# EAGLE board proto (EAGLE 9.3.2), part 1 of 4
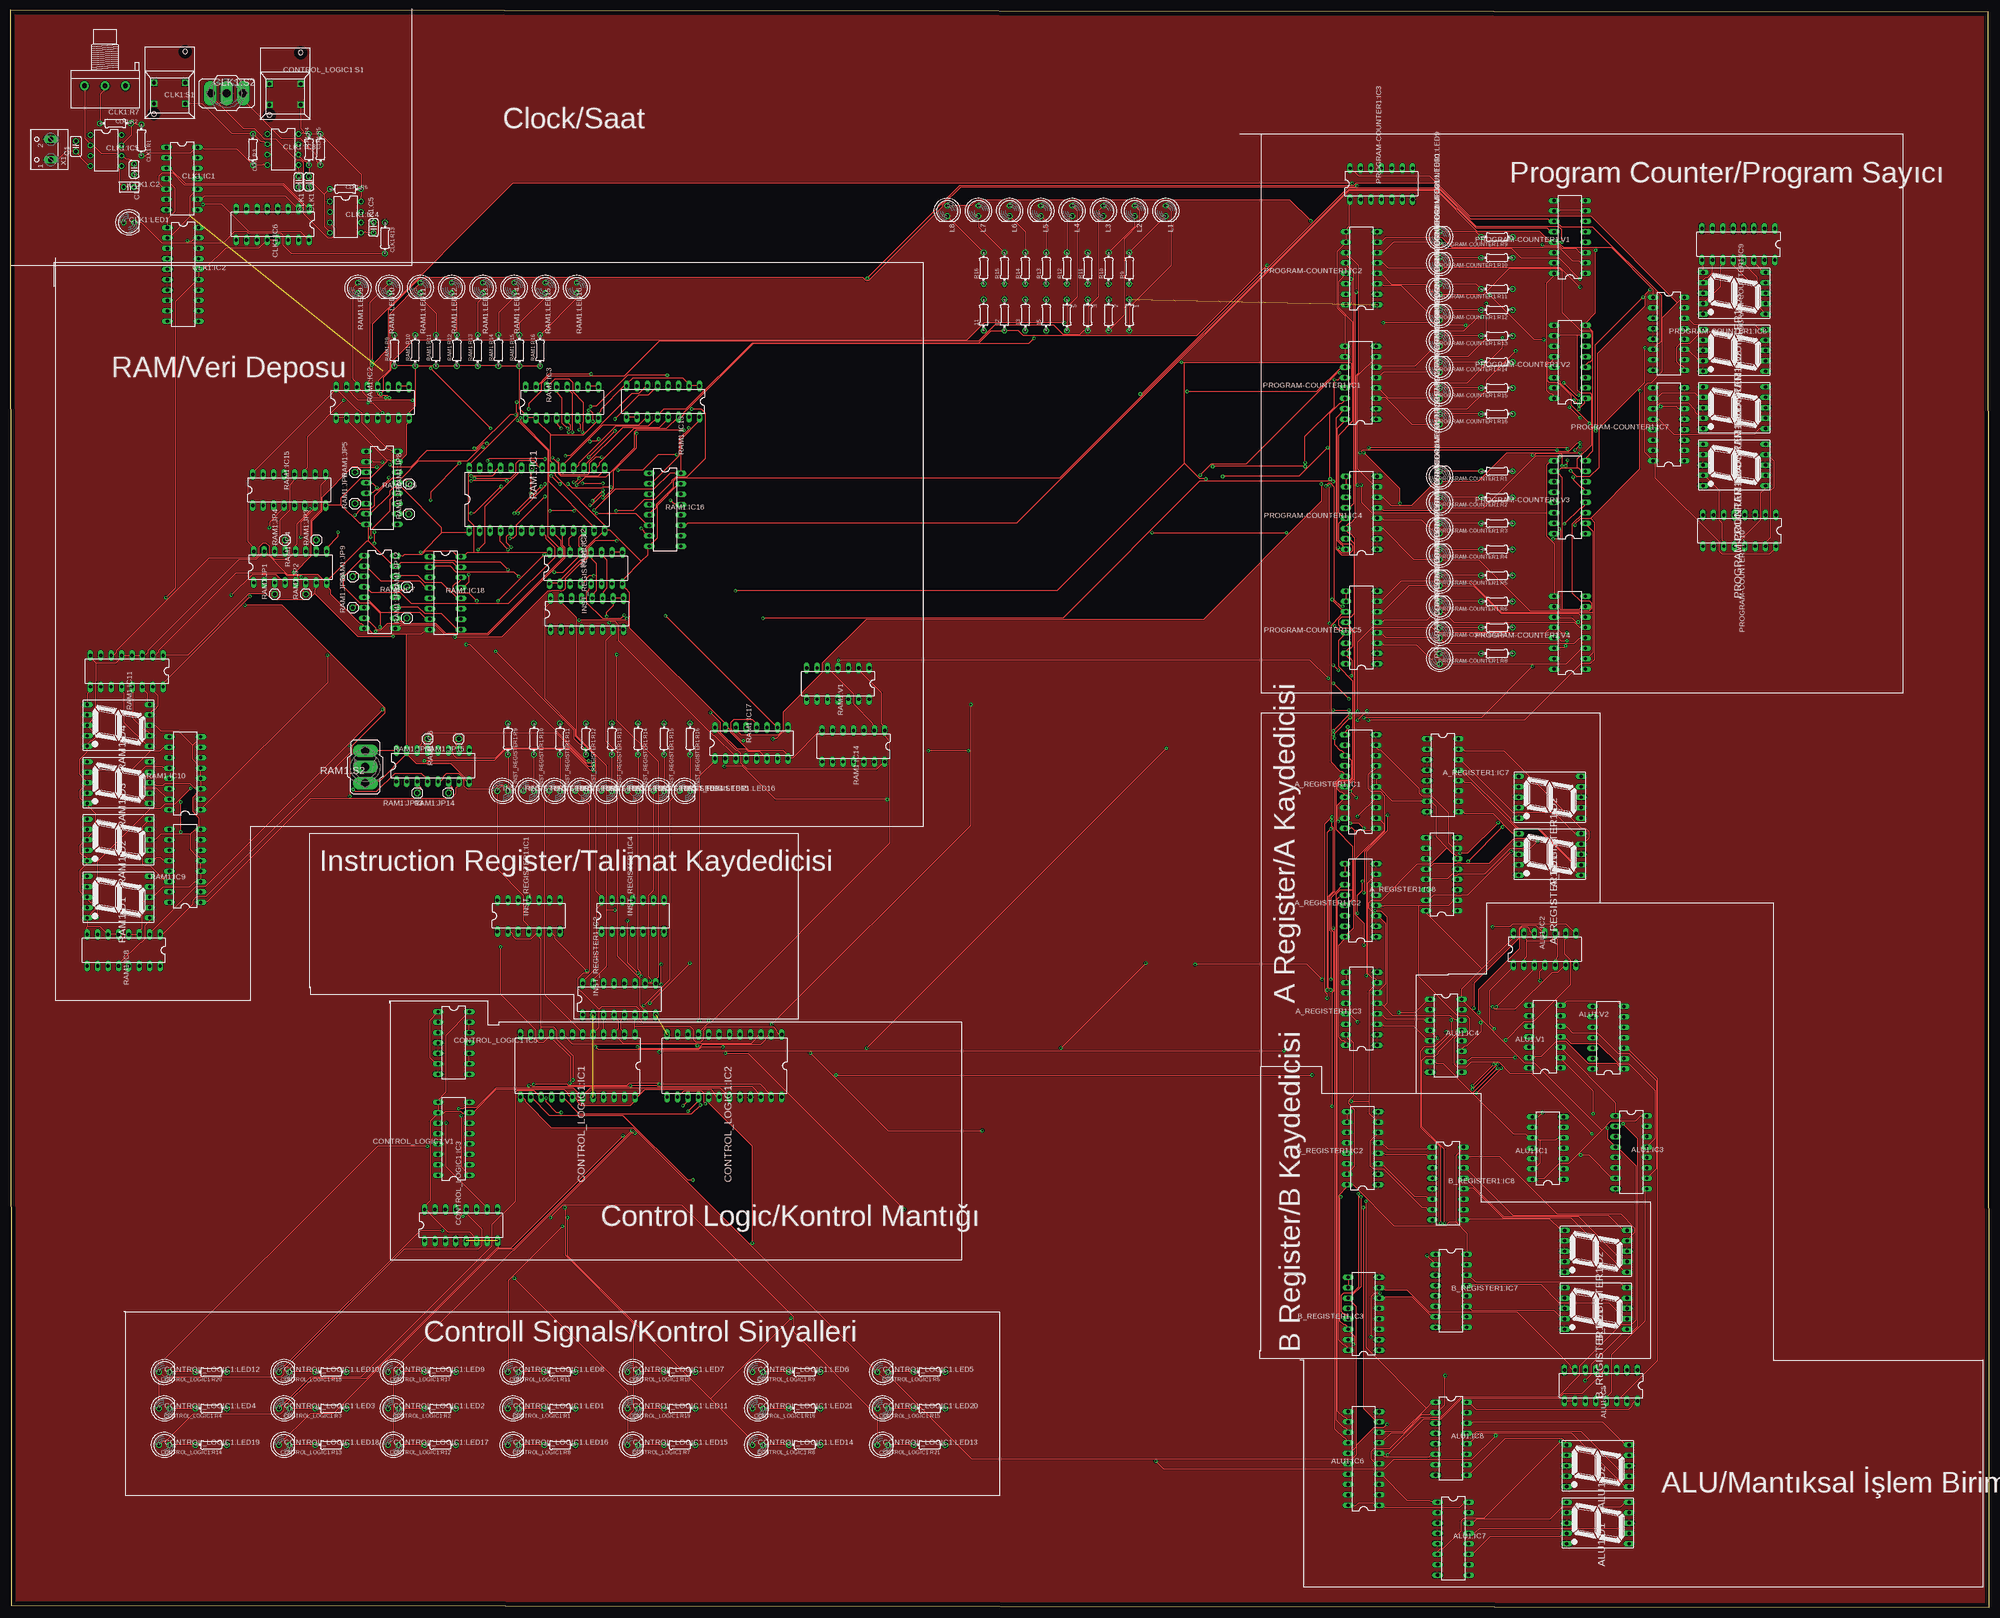
[diagram p0: board, top side]
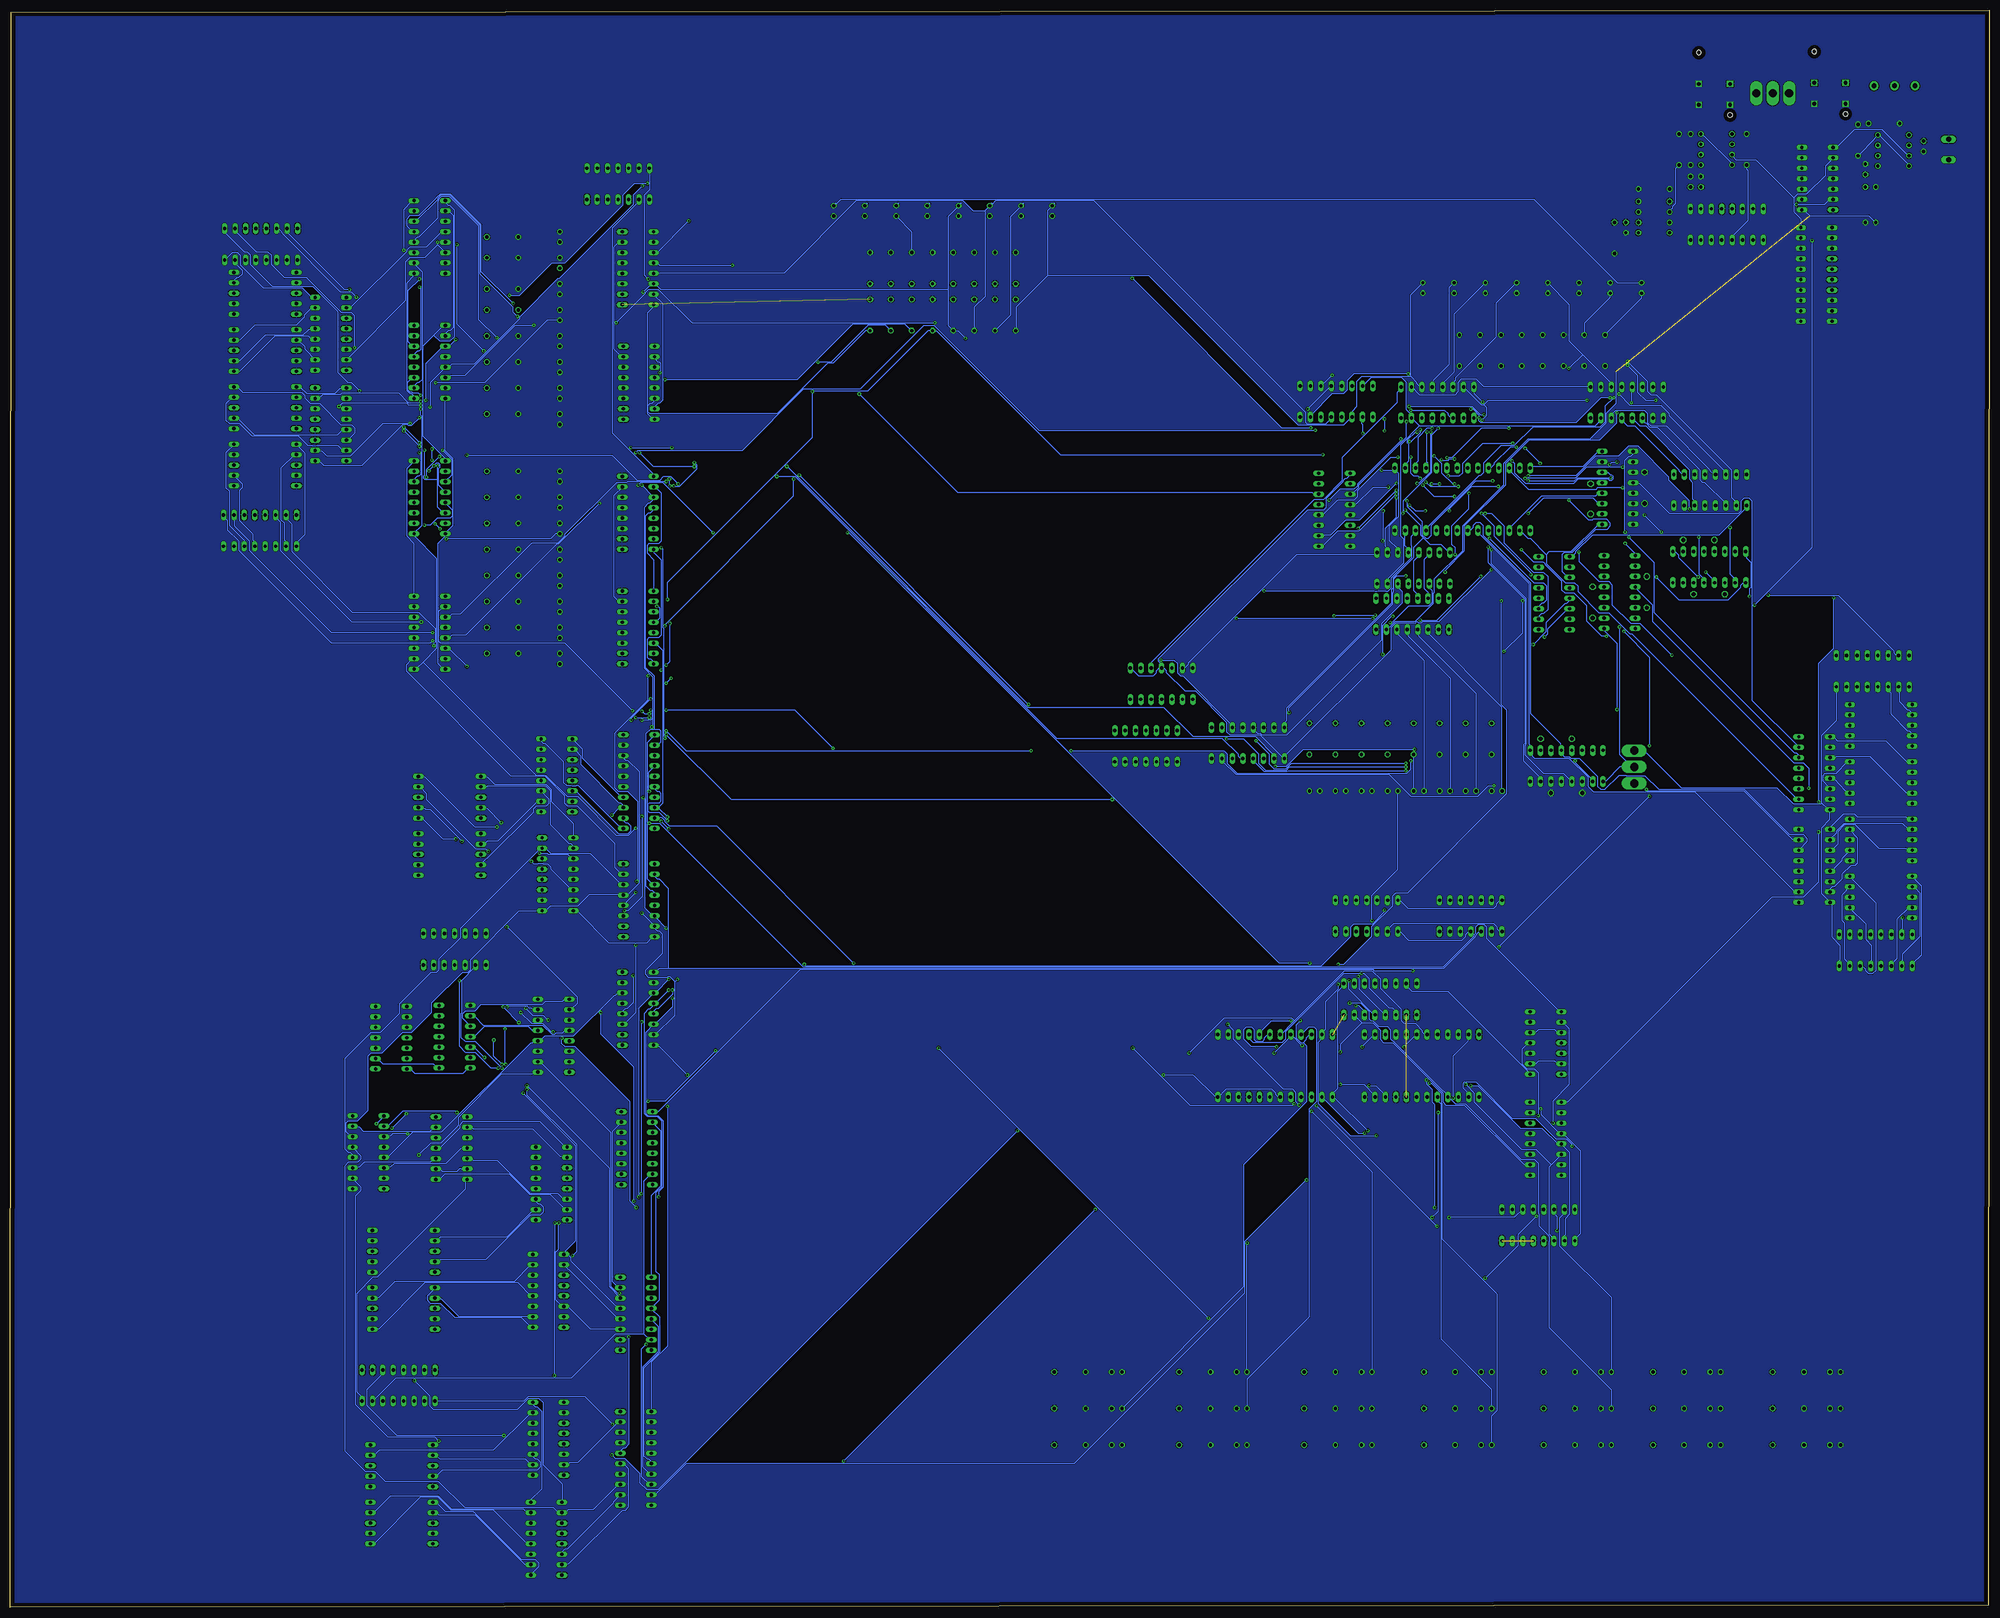
[diagram p1: board, bottom side, seen from below]

Size 482.83 x 389.56 mm. Coordinates in mm from the lower left corner, seen from the top.
Outline: 0.25,0.51 482.83,0 482.58,389.05 0,389.56 0.25,0.51
Copper layers (1*16): Top 0.035mm / dielectric 1.5mm / Bottom 0.035mm
Design rules "default": minimum track width 6mil, minimum drill 0.35mm, track to track 6mil, track to pad 6mil, pad to pad 6mil, via to via 6mil, smd to smd 6mil, copper to edge 40mil, drill to drill 6mil, minimum pad ring 10mil, minimum via ring 8mil, stop-mask expansion 4mil, vias tented up to drill 0mil, thermal gap 10mil
Net classes: 0 default: width 0.254 mm

## Footprints (pad centres in the part's own frame; a part is rotated, then mirrored left to right if it is on the bottom)
0204/7 = drill 0.813 octagon: 1 -3.81,0; 2 3.81,0
7SEG-13 = drill 0.813 long: 1 -5.08,-7.62; 2 -2.54,-7.62; 3 0,-7.62; 4 2.54,-7.62; 5 5.08,-7.62; 6 5.08,7.62; 7 2.54,7.62; 8 0,7.62; 9 -2.54,7.62; 10 -5.08,7.62
DIL20 = drill 0.813 long: 1 -11.43,-3.81; 2 -8.89,-3.81; 3 -6.35,-3.81; 4 -3.81,-3.81; 5 -1.27,-3.81; 6 1.27,-3.81; 7 3.81,-3.81; 8 6.35,-3.81; 9 8.89,-3.81; 10 11.43,-3.81; 11 11.43,3.81; 12 8.89,3.81; 13 6.35,3.81; 14 3.81,3.81; 15 1.27,3.81; 16 -1.27,3.81; 17 -3.81,3.81; 18 -6.35,3.81; 19 -8.89,3.81; 20 -11.43,3.81
DIL16 = drill 0.813 long: 1 -8.89,-3.81; 2 -6.35,-3.81; 3 -3.81,-3.81; 4 -1.27,-3.81; 5 1.27,-3.81; 6 3.81,-3.81; 7 6.35,-3.81; 8 8.89,-3.81; 9 8.89,3.81; 10 6.35,3.81; 11 3.81,3.81; 12 1.27,3.81; 13 -1.27,3.81; 14 -3.81,3.81; 15 -6.35,3.81; 16 -8.89,3.81
DIL14 = drill 0.813 long: 1 -7.62,-3.81; 2 -5.08,-3.81; 3 -2.54,-3.81; 4 0,-3.81; 5 2.54,-3.81; 6 5.08,-3.81; 7 7.62,-3.81; 8 7.62,3.81; 9 5.08,3.81; 10 2.54,3.81; 11 0,3.81; 12 -2.54,3.81; 13 -5.08,3.81; 14 -7.62,3.81
C025-025X050 = drill 0.813 octagon: 1 -1.27,0; 2 1.27,0
C025-024X044 = drill 0.813 octagon: 1 -1.27,0; 2 1.27,0
DIL08 = drill 0.813 pad 1.27: 1 -3.81,-3.81; 2 -1.27,-3.81; 3 1.27,-3.81; 4 3.81,-3.81; 5 3.81,3.81; 6 1.27,3.81; 7 -1.27,3.81; 8 -3.81,3.81
LED5MM = drill 0.813 octagon: A -1.27,0; K 1.27,0
3RP/1610N = drill 1.2 pad 2.184: 1 -5,0; 2 0,0; 3 5,0
5501 = drill 0.9 pad 1.5 square: 1A 0,3.81; 1B 0,-3.81; NC 5.08,-3.81; NO 5.08,3.81 | hole 1.1: -7.62,3.81; 7.62,-3.81
320-916 = drill 2.007 long: 1 0,4.013; 2 0,0; 3 0,-4.013
DIL24 = drill 0.813 long: 1 -13.97,-7.62; 2 -11.43,-7.62; 3 -8.89,-7.62; 4 -6.35,-7.62; 5 -3.81,-7.62; 6 -1.27,-7.62; 7 1.27,-7.62; 8 3.81,-7.62; 9 6.35,-7.62; 10 8.89,-7.62; 11 11.43,-7.62; 12 13.97,-7.62; 13 13.97,7.62; 14 11.43,7.62; 15 8.89,7.62; 16 6.35,7.62; 17 3.81,7.62; 18 1.27,7.62; 19 -1.27,7.62; 20 -3.81,7.62; 21 -6.35,7.62; 22 -8.89,7.62; 23 -11.43,7.62; 24 -13.97,7.62
DIL28-6 = drill 0.813 long: 1 -16.51,-7.62; 2 -13.97,-7.62; 3 -11.43,-7.62; 4 -8.89,-7.62; 5 -6.35,-7.62; 6 -3.81,-7.62; 7 -1.27,-7.62; 8 1.27,-7.62; 9 3.81,-7.62; 10 6.35,-7.62; 11 8.89,-7.62; 12 11.43,-7.62; 13 13.97,-7.62; 14 16.51,-7.62; 15 16.51,7.62; 16 13.97,7.62; 17 11.43,7.62; 18 8.89,7.62; 19 6.35,7.62; 20 3.81,7.62; 21 1.27,7.62; 22 -1.27,7.62; 23 -3.81,7.62; 24 -6.35,7.62; 25 -8.89,7.62; 26 -11.43,7.62; 27 -13.97,7.62; 28 -16.51,7.62
1X01 = drill 1.016 octagon: 1 0,0
W237-102 = drill 1.194 long: 1 -2.5,-1.27; 2 2.5,-1.27

## Placement (x,y rotation side)
1  10k  [0204/7]  273.05,315.21 270 top
2  10k  [0204/7]  267.97,315.21 270 top
3  10k  [0204/7]  262.89,315.21 270 top
5  10k  [0204/7]  257.81,315.21 270 top
11  10k  [0204/7]  237.49,315.21 90 top
12  10k  [0204/7]  242.57,315.21 90 top
13  10k  [0204/7]  247.65,315.21 90 top
15  10k  [0204/7]  252.73,315.21 90 top
A_REGISTER1:D1  [7SEG-13]  375.67,183.64 270 top
A_REGISTER1:D2  [7SEG-13]  375.67,197.61 270 top
A_REGISTER1:IC1  74ACT245N  [DIL20]  329.44,201.42 90 top
A_REGISTER1:IC2  74HC173N  [DIL16]  329.44,172.47 90 top
A_REGISTER1:IC3  74HC173N  [DIL16]  329.69,146.05 90 top
A_REGISTER1:IC7  74LS47N  [DIL16]  349.5,202.95 270 top
A_REGISTER1:IC8  74LS47N  [DIL16]  349.25,178.82 90 top
ALU1:D1  [7SEG-13]  387.35,20.57 270 top
ALU1:D2  [7SEG-13]  387.35,34.54 270 top
ALU1:IC1  74LS86N  [DIL14]  375.16,112.01 90 top
ALU1:IC2  74LS86N  [DIL14]  374.4,160.53 0 top
ALU1:IC3  74AC283N  [DIL16]  395.48,111 270 top
ALU1:IC4  74AC283N  [DIL16]  350.27,139.45 270 top
ALU1:IC5  74HC173N  [DIL16]  388.11,54.1 180 top
ALU1:IC6  74ACT245N  [DIL20]  330.2,36.32 90 top
ALU1:IC7  74LS47N  [DIL16]  352.04,16.76 270 top
ALU1:IC8  74LS47N  [DIL16]  351.54,41.15 270 top
ALU1:V1  744002N  [DIL14]  374.4,139.19 90 top
ALU1:V2  7409N  [DIL14]  389.89,138.94 90 top
B_REGISTER1:D1  [7SEG-13]  386.84,72.9 270 top
B_REGISTER1:D2  [7SEG-13]  386.84,86.87 270 top
B_REGISTER1:IC2  74HC173N  [DIL16]  329.95,112.01 90 top
B_REGISTER1:IC3  74HC173N  [DIL16]  330.2,71.63 90 top
B_REGISTER1:IC7  74LS47N  [DIL16]  351.54,77.22 270 top
B_REGISTER1:IC8  74LS47N  [DIL16]  350.77,103.38 270 top
C1  330uf  [C025-025X050]  16,356.36 90 top
CLK1:C1  1uf  [C025-024X044]  30.23,350.77 270 top
CLK1:C2  0.01uF  [C025-025X050]  28.96,346.46 0 top
CLK1:C3  0.01uF  [C025-024X044]  70.36,347.73 270 top
CLK1:C4  0.1uf  [C025-024X044]  72.9,347.73 270 top
CLK1:C5  0.01uF  [C025-024X044]  88.65,336.55 90 top
CLK1:IC1  74ALS09N  [DIL14]  41.91,348.49 270 top
CLK1:IC2  74AC11004  [DIL20]  42.16,325.12 270 top
CLK1:IC3  LM555N  [DIL08]  66.55,355.6 270 top
CLK1:IC4  LM555N  [DIL08]  81.79,339.09 270 top
CLK1:IC5  LM555N  [DIL08]  23.37,355.35 270 top
CLK1:IC6  74AC11032  [DIL16]  64.01,337.31 180 top
CLK1:LED1  [LED5MM]  28.96,337.82 0 top
CLK1:R1  1k  [0204/7]  32,357.89 270 top
CLK1:R2  1k  [0204/7]  25.65,361.95 0 top
CLK1:R3  1k  [0204/7]  59.18,355.6 270 top
CLK1:R4  1k  [0204/7]  72.9,355.6 90 top
CLK1:R5  1k  [0204/7]  75.69,355.6 90 top
CLK1:R6  1k  [0204/7]  81.79,345.95 0 top
CLK1:R7  [3RP/1610N]  23.11,371.09 180 top
CLK1:R13  220  [0204/7]  91.44,334.01 270 top
CLK1:S1  5501  [5501]  38.86,371.86 270 top
CLK1:S2  [320-916]  52.83,369.32 270 top
CONTROL_LOGIC1:IC1  [DIL24]  138.43,132.08 180 top
CONTROL_LOGIC1:IC2  [DIL24]  174.24,132.08 180 top
CONTROL_LOGIC1:IC3  74AC138N  [DIL16]  109.98,93.22 0 top
CONTROL_LOGIC1:IC5  74AC00N  [DIL14]  108.2,137.67 270 top
CONTROL_LOGIC1:LED1  [LED5MM]  122.68,48.51 0 top
CONTROL_LOGIC1:LED2  [LED5MM]  93.47,48.51 0 top
CONTROL_LOGIC1:LED3  [LED5MM]  66.8,48.51 0 top
CONTROL_LOGIC1:LED4  [LED5MM]  37.59,48.51 0 top
CONTROL_LOGIC1:LED5  [LED5MM]  212.85,57.4 0 top
CONTROL_LOGIC1:LED6  [LED5MM]  182.37,57.4 0 top
CONTROL_LOGIC1:LED7  [LED5MM]  151.89,57.4 0 top
CONTROL_LOGIC1:LED8  [LED5MM]  122.68,57.4 0 top
CONTROL_LOGIC1:LED9  [LED5MM]  93.47,57.4 0 top
CONTROL_LOGIC1:LED10  [LED5MM]  66.8,57.4 0 top
CONTROL_LOGIC1:LED11  [LED5MM]  151.89,48.51 0 top
CONTROL_LOGIC1:LED12  [LED5MM]  37.59,57.4 0 top
CONTROL_LOGIC1:LED13  [LED5MM]  212.85,39.62 0 top
CONTROL_LOGIC1:LED14  [LED5MM]  182.37,39.62 0 top
CONTROL_LOGIC1:LED15  [LED5MM]  151.89,39.62 0 top
CONTROL_LOGIC1:LED16  [LED5MM]  122.68,39.62 0 top
CONTROL_LOGIC1:LED17  [LED5MM]  93.47,39.62 0 top
CONTROL_LOGIC1:LED18  [LED5MM]  66.8,39.62 0 top
CONTROL_LOGIC1:LED19  [LED5MM]  37.59,39.62 0 top
CONTROL_LOGIC1:LED20  [LED5MM]  212.85,48.51 0 top
CONTROL_LOGIC1:LED21  [LED5MM]  182.37,48.51 0 top
CONTROL_LOGIC1:R1  220  [0204/7]  134.11,48.51 180 top
CONTROL_LOGIC1:R2  220  [0204/7]  104.9,48.51 180 top
CONTROL_LOGIC1:R3  220  [0204/7]  78.23,48.51 180 top
CONTROL_LOGIC1:R4  220  [0204/7]  49.02,48.51 180 top
CONTROL_LOGIC1:R5  220  [0204/7]  224.28,57.4 180 top
CONTROL_LOGIC1:R6  220  [0204/7]  193.8,39.62 180 top
CONTROL_LOGIC1:R7  220  [0204/7]  163.32,39.62 180 top
CONTROL_LOGIC1:R8  220  [0204/7]  134.11,39.62 180 top
CONTROL_LOGIC1:R9  220  [0204/7]  193.8,57.4 180 top
CONTROL_LOGIC1:R10  220  [0204/7]  163.32,57.4 180 top
CONTROL_LOGIC1:R11  220  [0204/7]  134.11,57.4 180 top
CONTROL_LOGIC1:R12  220  [0204/7]  104.9,39.62 180 top
CONTROL_LOGIC1:R13  220  [0204/7]  78.23,39.62 180 top
CONTROL_LOGIC1:R14  220  [0204/7]  49.02,39.62 180 top
CONTROL_LOGIC1:R15  220  [0204/7]  224.28,48.51 180 top
CONTROL_LOGIC1:R16  220  [0204/7]  193.8,48.51 180 top
CONTROL_LOGIC1:R17  220  [0204/7]  104.9,57.4 180 top
CONTROL_LOGIC1:R18  220  [0204/7]  78.23,57.4 180 top
CONTROL_LOGIC1:R19  220  [0204/7]  163.32,48.51 180 top
CONTROL_LOGIC1:R20  220  [0204/7]  49.02,57.4 180 top
CONTROL_LOGIC1:R21  220  [0204/7]  224.28,39.62 180 top
CONTROL_LOGIC1:S1  5501  [5501]  67.06,371.6 270 top
CONTROL_LOGIC1:V1  74161N  [DIL16]  108.2,114.3 90 top
INST_REGISTER1:IC1  74ALS09N  [DIL14]  126.49,168.66 0 top
INST_REGISTER1:IC2  74HC173N  [DIL16]  148.59,148.34 0 top
INST_REGISTER1:IC3  74HC173N  [DIL16]  140.72,242.32 0 top
INST_REGISTER1:IC4  74AC04N  [DIL14]  151.89,168.66 0 top
INST_REGISTER1:LED9  [LED5MM]  120.14,199.14 0 top
INST_REGISTER1:LED10  [LED5MM]  126.49,199.14 0 top
INST_REGISTER1:LED11  [LED5MM]  132.84,199.14 0 top
INST_REGISTER1:LED12  [LED5MM]  139.19,199.14 0 top
INST_REGISTER1:LED13  [LED5MM]  145.54,199.14 0 top
INST_REGISTER1:LED14  [LED5MM]  151.89,199.14 0 top
INST_REGISTER1:LED15  [LED5MM]  158.24,199.14 0 top
INST_REGISTER1:LED16  [LED5MM]  164.59,199.14 0 top
INST_REGISTER1:R9  220  [0204/7]  121.41,211.84 270 top
INST_REGISTER1:R10  220  [0204/7]  127.76,211.84 270 top
INST_REGISTER1:R11  220  [0204/7]  134.11,211.84 270 top
INST_REGISTER1:R12  220  [0204/7]  140.46,211.84 270 top
INST_REGISTER1:R13  220  [0204/7]  146.81,211.84 270 top
INST_REGISTER1:R14  220  [0204/7]  153.16,211.84 270 top
INST_REGISTER1:R15  220  [0204/7]  159.51,211.84 270 top
INST_REGISTER1:R16  220  [0204/7]  165.86,211.84 270 top
L1  [LED5MM]  281.94,340.61 270 top
L2  [LED5MM]  274.32,340.61 270 top
L3  [LED5MM]  266.7,340.61 270 top
L4  [LED5MM]  259.08,340.61 270 top
L5  [LED5MM]  251.46,340.61 270 top
L6  [LED5MM]  243.84,340.61 270 top
L7  [LED5MM]  236.22,340.61 270 top
L8  [LED5MM]  228.6,340.61 270 top
PROGRAM-COUNTER1:D1  [7SEG-13]  420.62,292.61 270 top
PROGRAM-COUNTER1:D2  [7SEG-13]  420.62,306.58 270 top
PROGRAM-COUNTER1:D3  [7SEG-13]  420.62,320.55 270 top
PROGRAM-COUNTER1:D4  [7SEG-13]  420.62,278.64 270 top
PROGRAM-COUNTER1:IC1  74HC173N  [DIL16]  329.44,298.7 90 top
PROGRAM-COUNTER1:IC2  74HC173N  [DIL16]  329.69,326.64 90 top
PROGRAM-COUNTER1:IC3  74AC04N  [DIL14]  334.52,347.22 0 top
PROGRAM-COUNTER1:IC4  74HC173N  [DIL16]  329.69,266.95 90 top
PROGRAM-COUNTER1:IC5  74HC173N  [DIL16]  329.69,239.01 90 top
PROGRAM-COUNTER1:IC7  74LS47N  [DIL16]  404.62,288.54 90 top
PROGRAM-COUNTER1:IC8  74LS47N  [DIL16]  404.62,310.64 270 top
PROGRAM-COUNTER1:IC9  74LS47N  [DIL16]  421.64,332.49 180 top
PROGRAM-COUNTER1:IC10  74LS47N  [DIL16]  421.89,262.64 180 top
PROGRAM-COUNTER1:LED1  [LED5MM]  348.74,275.84 90 top
PROGRAM-COUNTER1:LED2  [LED5MM]  348.74,269.49 90 top
PROGRAM-COUNTER1:LED3  [LED5MM]  348.74,263.14 90 top
PROGRAM-COUNTER1:LED4  [LED5MM]  348.74,256.79 90 top
PROGRAM-COUNTER1:LED5  [LED5MM]  348.74,250.44 90 top
PROGRAM-COUNTER1:LED6  [LED5MM]  348.74,244.09 90 top
PROGRAM-COUNTER1:LED7  [LED5MM]  348.74,237.74 90 top
PROGRAM-COUNTER1:LED8  [LED5MM]  348.74,231.39 90 top
PROGRAM-COUNTER1:LED9  [LED5MM]  348.74,334.26 90 top
PROGRAM-COUNTER1:LED10  [LED5MM]  348.74,327.91 90 top
PROGRAM-COUNTER1:LED11  [LED5MM]  348.74,321.56 90 top
PROGRAM-COUNTER1:LED12  [LED5MM]  348.74,315.21 90 top
PROGRAM-COUNTER1:LED13  [LED5MM]  348.74,308.86 90 top
PROGRAM-COUNTER1:LED14  [LED5MM]  348.74,302.51 90 top
PROGRAM-COUNTER1:LED15  [LED5MM]  348.74,296.16 90 top
PROGRAM-COUNTER1:LED16  [LED5MM]  348.74,289.81 90 top
PROGRAM-COUNTER1:R1  220  [0204/7]  362.71,277.11 180 top
PROGRAM-COUNTER1:R2  220  [0204/7]  362.71,270.76 180 top
PROGRAM-COUNTER1:R3  220  [0204/7]  362.71,264.41 180 top
PROGRAM-COUNTER1:R4  220  [0204/7]  362.71,258.06 180 top
PROGRAM-COUNTER1:R5  220  [0204/7]  362.71,251.71 180 top
PROGRAM-COUNTER1:R6  220  [0204/7]  362.71,245.36 180 top
PROGRAM-COUNTER1:R7  220  [0204/7]  362.71,239.01 180 top
PROGRAM-COUNTER1:R8  220  [0204/7]  362.71,232.66 180 top
PROGRAM-COUNTER1:R9  220  [0204/7]  362.71,334.26 180 top
PROGRAM-COUNTER1:R10  220  [0204/7]  362.71,329.18 180 top
PROGRAM-COUNTER1:R11  220  [0204/7]  362.71,321.56 180 top
PROGRAM-COUNTER1:R12  220  [0204/7]  362.71,316.48 180 top
PROGRAM-COUNTER1:R13  220  [0204/7]  362.71,310.13 180 top
PROGRAM-COUNTER1:R14  220  [0204/7]  362.71,303.78 180 top
PROGRAM-COUNTER1:R15  220  [0204/7]  362.71,297.43 180 top
PROGRAM-COUNTER1:R16  220  [0204/7]  362.71,291.08 180 top
PROGRAM-COUNTER1:V1  74161N  [DIL16]  380.49,334.26 90 top
PROGRAM-COUNTER1:V2  74161N  [DIL16]  380.49,303.78 90 top
PROGRAM-COUNTER1:V3  74161N  [DIL16]  380.49,270.76 90 top
PROGRAM-COUNTER1:V4  74161N  [DIL16]  380.49,237.74 90 top
R9  220  [0204/7]  273.05,326.64 90 top
R10  220  [0204/7]  267.97,326.64 90 top
R11  220  [0204/7]  262.89,326.64 90 top
R12  220  [0204/7]  257.81,326.64 90 top
R13  220  [0204/7]  252.73,326.64 90 top
R14  220  [0204/7]  247.65,326.64 90 top
R15  220  [0204/7]  242.57,326.64 90 top
R16  220  [0204/7]  237.49,326.64 90 top
RAM1:D1  [7SEG-13]  26.42,173.23 270 top
RAM1:D2  [7SEG-13]  26.42,187.2 270 top
RAM1:D3  [7SEG-13]  26.42,201.17 270 top
RAM1:D4  [7SEG-13]  26.42,215.14 270 top
RAM1:IC1  CY62256LL-PC  [DIL28-6]  128.52,270.26 0 top
RAM1:IC2  74HC173N  [DIL16]  88.39,293.88 0 top
RAM1:IC3  74HC173N  [DIL16]  134.62,293.88 0 top
RAM1:IC4  74AC157N  [DIL16]  68.33,253.75 0 top
RAM1:IC5  74AC157N  [DIL16]  90.68,273.05 270 top
RAM1:IC6  74AC157N  [DIL16]  103.12,205.23 0 top
RAM1:IC7  74AC157N  [DIL16]  90.17,247.65 270 top
RAM1:IC8  74LS47N  [DIL16]  27.69,160.27 180 top
RAM1:IC9  74LS47N  [DIL16]  42.67,180.85 90 top
RAM1:IC10  74LS47N  [DIL16]  42.67,203.45 90 top
RAM1:IC11  74LS47N  [DIL16]  28.45,228.35 180 top
RAM1:IC12  74HC173N  [DIL16]  140.46,253.49 0 top
RAM1:IC13  74HC173N  [DIL16]  159.26,294.13 180 top
RAM1:IC14  74AC04N  [DIL14]  205.74,210.06 180 top
RAM1:IC15  74AC157N  [DIL16]  68.07,272.54 0 top
RAM1:IC16  74AC157N  [DIL16]  159.77,267.72 270 top
RAM1:IC17  74AC157N  [DIL16]  180.85,210.82 0 top
RAM1:IC18  74AC157N  [DIL16]  106.17,247.4 270 top
RAM1:JP1  [1X01]  64.52,247.14 90 top
RAM1:JP2  [1X01]  72.14,247.14 90 top
RAM1:JP3  [1X01]  74.68,260.35 90 top
RAM1:JP4  [1X01]  67.06,260.35 90 top
RAM1:JP5  [1X01]  84.07,276.86 90 top
RAM1:JP6  [1X01]  84.07,269.24 90 top
RAM1:JP7  [1X01]  97.28,266.7 90 top
RAM1:JP8  [1X01]  97.28,274.07 90 top
RAM1:JP9  [1X01]  83.57,251.46 90 top
RAM1:JP10  [1X01]  83.57,243.84 90 top
RAM1:JP11  [1X01]  96.77,241.3 90 top
RAM1:JP12  [1X01]  96.77,248.92 90 top
RAM1:JP13  [1X01]  99.31,198.63 180 top
RAM1:JP14  [1X01]  106.93,198.63 180 top
RAM1:JP15  [1X01]  109.47,211.84 180 top
RAM1:JP16  [1X01]  101.85,211.84 180 top
RAM1:LED9  [LED5MM]  84.84,321.82 270 top
RAM1:LED10  [LED5MM]  92.46,321.82 270 top
RAM1:LED11  [LED5MM]  100.08,321.82 270 top
RAM1:LED12  [LED5MM]  107.7,321.82 270 top
RAM1:LED13  [LED5MM]  115.32,321.82 270 top
RAM1:LED14  [LED5MM]  122.94,321.82 270 top
RAM1:LED15  [LED5MM]  130.56,321.82 270 top
RAM1:LED16  [LED5MM]  138.18,321.82 270 top
RAM1:R9  220  [0204/7]  93.73,306.58 90 top
RAM1:R10  220  [0204/7]  98.81,306.58 90 top
RAM1:R11  220  [0204/7]  103.89,306.58 90 top
RAM1:R12  220  [0204/7]  108.97,306.58 90 top
RAM1:R13  220  [0204/7]  114.05,306.58 90 top
RAM1:R14  220  [0204/7]  119.13,306.58 90 top
RAM1:R15  220  [0204/7]  124.21,306.58 90 top
RAM1:R16  220  [0204/7]  129.29,306.58 90 top
RAM1:S2  [320-916]  86.61,204.98 180 top
RAM1:V1  7409N  [DIL14]  201.93,225.3 180 top
X1  [W237-102]  8.64,355.6 90 top

## Library data of the parts
1-3 5 11-13 15 CLK1:R1-CLK1:R6 CLK1:R13 CONTROL_LOGIC1:R1-CONTROL_LOGIC1:R21 INST_REGISTER1:R9-INST_REGISTER1:R16 PROGRAM-COUNTER1:R1-PROGRAM-COUNTER1:R16 R9-R16 RAM1:R9-RAM1:R16 = rcl; SPICEPREFIX: R
A_REGISTER1:D1 A_REGISTER1:D2 ALU1:D1 ALU1:D2 B_REGISTER1:D1 B_REGISTER1:D2 PROGRAM-COUNTER1:D1-PROGRAM-COUNTER1:D4 RAM1:D1-RAM1:D4 = special
A_REGISTER1:IC1-A_REGISTER1:IC3 A_REGISTER1:IC7 A_REGISTER1:IC8 ALU1:IC3-ALU1:IC8 B_REGISTER1:IC2 B_REGISTER1:IC3 B_REGISTER1:IC7 B_REGISTER1:IC8 CLK1:IC1 CONTROL_LOGIC1:IC3 CONTROL_LOGIC1:IC5 INST_REGISTER1:IC1-INST_REGISTER1:IC4 PROGRAM-COUNTER1:IC1-PROGRAM-COUNTER1:IC5 PROGRAM-COUNTER1:IC7-PROGRAM-COUNTER1:IC10 RAM1:IC2-RAM1:IC18 = 74xx-eu
ALU1:IC1 ALU1:IC2 = 74xx-us
ALU1:V1 ALU1:V2 CONTROL_LOGIC1:V1 PROGRAM-COUNTER1:V1-PROGRAM-COUNTER1:V4 RAM1:V1 = 74ttl-din
C1 CLK1:C1-CLK1:C5 = rcl; SPICEPREFIX: C
CLK1:IC2 CLK1:IC6 = 74ac-logic
CLK1:IC3-CLK1:IC5 = linear
CLK1:LED1 CONTROL_LOGIC1:LED1-CONTROL_LOGIC1:LED21 INST_REGISTER1:LED9-INST_REGISTER1:LED16 L1-L8 PROGRAM-COUNTER1:LED1-PROGRAM-COUNTER1:LED16 RAM1:LED9-RAM1:LED16 = led
CLK1:R7 = pot
CLK1:S1 CLK1:S2 CONTROL_LOGIC1:S1 RAM1:S2 = switch
CONTROL_LOGIC1:IC1 CONTROL_LOGIC1:IC2 = memory
RAM1:IC1 = memory-sram
RAM1:JP1-RAM1:JP16 = pinhead
X1 = con-wago-500; MPN: 237-102; OC_FARNELL: unknown; OC_NEWARK: 70K9898

## Nets
8B_1: 1.2 A_REGISTER1:IC1.18 A_REGISTER1:IC3.14 ALU1:IC6.18 B_REGISTER1:IC3.14 INST_REGISTER1:IC3.14 L1.A PROGRAM-COUNTER1:IC1.14 PROGRAM-COUNTER1:IC5.14 RAM1:IC1.11 RAM1:IC2.14 RAM1:IC12.14 RAM1:LED9.A
8B_2: 2.2 A_REGISTER1:IC1.17 A_REGISTER1:IC3.13 ALU1:IC6.17 B_REGISTER1:IC3.13 INST_REGISTER1:IC3.13 L2.A PROGRAM-COUNTER1:IC1.13 PROGRAM-COUNTER1:IC5.13 RAM1:IC1.12 RAM1:IC2.13 RAM1:IC12.13 RAM1:LED10.A
8B_3: 3.2 A_REGISTER1:IC1.16 A_REGISTER1:IC3.12 ALU1:IC6.16 B_REGISTER1:IC3.12 INST_REGISTER1:IC3.12 L3.A PROGRAM-COUNTER1:IC1.12 PROGRAM-COUNTER1:IC5.12 RAM1:IC1.13 RAM1:IC2.12 RAM1:IC12.12 RAM1:LED11.A
8B_4: 5.2 A_REGISTER1:IC1.15 A_REGISTER1:IC3.11 ALU1:IC6.15 B_REGISTER1:IC3.11 INST_REGISTER1:IC3.11 L4.A PROGRAM-COUNTER1:IC1.11 PROGRAM-COUNTER1:IC5.11 RAM1:IC1.15 RAM1:IC2.11 RAM1:IC12.11 RAM1:LED12.A
8B_5: 15.1 A_REGISTER1:IC1.14 A_REGISTER1:IC2.14 ALU1:IC6.14 L5.A PROGRAM-COUNTER1:IC2.14 PROGRAM-COUNTER1:IC4.14 RAM1:IC1.16 RAM1:IC3.14 RAM1:IC13.14 RAM1:LED13.A
8B_6: 13.1 A_REGISTER1:IC1.13 A_REGISTER1:IC2.13 ALU1:IC6.13 L6.A PROGRAM-COUNTER1:IC2.13 PROGRAM-COUNTER1:IC4.13 RAM1:IC1.17 RAM1:IC3.13 RAM1:IC13.13 RAM1:LED14.A
8B_7: 12.1 A_REGISTER1:IC1.12 A_REGISTER1:IC2.12 ALU1:IC6.12 L7.A PROGRAM-COUNTER1:IC2.12 PROGRAM-COUNTER1:IC4.12 RAM1:IC1.18 RAM1:IC3.12 RAM1:IC13.12 RAM1:LED15.A
8B_8: 11.1 A_REGISTER1:IC1.11 A_REGISTER1:IC2.11 ALU1:IC6.11 L8.A PROGRAM-COUNTER1:IC2.11 PROGRAM-COUNTER1:IC4.11 RAM1:IC1.19 RAM1:IC3.11 RAM1:IC13.11 RAM1:LED16.A
A_REGISTER1:N$9: A_REGISTER1:D1.7 A_REGISTER1:IC7.13
A_REGISTER1:N$10: A_REGISTER1:D1.6 A_REGISTER1:IC7.12
A_REGISTER1:N$11: A_REGISTER1:D1.4 A_REGISTER1:IC7.11
A_REGISTER1:N$12: A_REGISTER1:D1.2 A_REGISTER1:IC7.10
A_REGISTER1:N$13: A_REGISTER1:D1.1 A_REGISTER1:IC7.9
A_REGISTER1:N$14: A_REGISTER1:D1.9 A_REGISTER1:IC7.15
A_REGISTER1:N$15: A_REGISTER1:D1.10 A_REGISTER1:IC7.14
A_REGISTER1:N$16: A_REGISTER1:D2.7 A_REGISTER1:IC8.13
A_REGISTER1:N$21: A_REGISTER1:D2.6 A_REGISTER1:IC8.12
A_REGISTER1:N$22: A_REGISTER1:D2.4 A_REGISTER1:IC8.11
A_REGISTER1:N$23: A_REGISTER1:D2.2 A_REGISTER1:IC8.10
A_REGISTER1:N$24: A_REGISTER1:D2.1 A_REGISTER1:IC8.9
A_REGISTER1:N$29: A_REGISTER1:D2.9 A_REGISTER1:IC8.15
A_REGISTER1:N$30: A_REGISTER1:D2.10 A_REGISTER1:IC8.14
ALU1:+UB: ALU1:V1.14 ALU1:V2.14
ALU1:-UB: ALU1:V1.7 ALU1:V2.7
ALU1:A_9: ALU1:IC4.4 ALU1:IC6.9 ALU1:IC8.7 ALU1:V1.9
ALU1:A_10: ALU1:IC4.1 ALU1:IC6.8 ALU1:IC8.1 ALU1:V1.10
ALU1:A_11: ALU1:IC4.10 ALU1:IC6.6 ALU1:IC8.6 ALU1:V1.12
ALU1:A_12: ALU1:IC4.13 ALU1:IC6.7 ALU1:IC8.2 ALU1:V1.11
ALU1:A_13: ALU1:IC3.4 ALU1:IC6.5 ALU1:IC7.7 ALU1:V1.2
ALU1:A_14: ALU1:IC3.1 ALU1:IC6.4 ALU1:IC7.1 ALU1:V1.3
ALU1:A_15: ALU1:IC3.13 ALU1:IC6.3 ALU1:IC7.2 ALU1:V1.4
ALU1:A_16: ALU1:IC3.10 ALU1:IC6.2 ALU1:IC7.6 ALU1:V1.5
ALU1:N$1: ALU1:IC2.11 ALU1:IC4.6
ALU1:N$2: ALU1:IC2.8 ALU1:IC4.2
ALU1:N$3: ALU1:IC2.6 ALU1:IC4.15
ALU1:N$4: ALU1:IC2.3 ALU1:IC4.11
ALU1:N$5: ALU1:IC1.11 ALU1:IC3.6
ALU1:N$6: ALU1:IC1.6 ALU1:IC3.15
ALU1:N$7: ALU1:IC1.8 ALU1:IC3.2
ALU1:N$8: ALU1:IC1.3 ALU1:IC3.11
ALU1:N$9: ALU1:IC3.7 ALU1:IC4.9
ALU1:N$10: ALU1:D1.7 ALU1:IC7.13
ALU1:N$11: ALU1:D1.6 ALU1:IC7.12
ALU1:N$12: ALU1:D1.4 ALU1:IC7.11
ALU1:N$13: ALU1:D1.2 ALU1:IC7.10
ALU1:N$14: ALU1:D1.1 ALU1:IC7.9
ALU1:N$15: ALU1:D1.9 ALU1:IC7.15
ALU1:N$16: ALU1:D1.10 ALU1:IC7.14
ALU1:N$17: ALU1:D2.7 ALU1:IC8.13
ALU1:N$18: ALU1:V1.1 ALU1:V2.2
ALU1:N$19: ALU1:V1.13 ALU1:V2.1
ALU1:N$20: ALU1:IC5.14 ALU1:V2.3
ALU1:N$21: ALU1:D2.6 ALU1:IC8.12
ALU1:N$22: ALU1:D2.4 ALU1:IC8.11
ALU1:N$23: ALU1:D2.2 ALU1:IC8.10
ALU1:N$24: ALU1:D2.1 ALU1:IC8.9
ALU1:N$25: ALU1:IC3.9 ALU1:IC5.13
ALU1:N$29: ALU1:D2.9 ALU1:IC8.15
ALU1:N$30: ALU1:D2.10 ALU1:IC8.14
ALUSUB: CONTROL_LOGIC1:IC1.15 CONTROL_LOGIC1:LED3.A
B_REGISTER1:8B_9: B_REGISTER1:IC2.11
B_REGISTER1:8B_10: B_REGISTER1:IC2.12
B_REGISTER1:8B_11: B_REGISTER1:IC2.13
B_REGISTER1:8B_12: B_REGISTER1:IC2.14
B_REGISTER1:N$9: B_REGISTER1:D1.7 B_REGISTER1:IC7.13
B_REGISTER1:N$10: B_REGISTER1:D1.6 B_REGISTER1:IC7.12
B_REGISTER1:N$11: B_REGISTER1:D1.4 B_REGISTER1:IC7.11
B_REGISTER1:N$12: B_REGISTER1:D1.2 B_REGISTER1:IC7.10
B_REGISTER1:N$13: B_REGISTER1:D1.1 B_REGISTER1:IC7.9
B_REGISTER1:N$14: B_REGISTER1:D1.9 B_REGISTER1:IC7.15
B_REGISTER1:N$15: B_REGISTER1:D1.10 B_REGISTER1:IC7.14
B_REGISTER1:N$16: B_REGISTER1:D2.7 B_REGISTER1:IC8.13
B_REGISTER1:N$21: B_REGISTER1:D2.6 B_REGISTER1:IC8.12
B_REGISTER1:N$22: B_REGISTER1:D2.4 B_REGISTER1:IC8.11
B_REGISTER1:N$23: B_REGISTER1:D2.2 B_REGISTER1:IC8.10
B_REGISTER1:N$24: B_REGISTER1:D2.1 B_REGISTER1:IC8.9
B_REGISTER1:N$29: B_REGISTER1:D2.9 B_REGISTER1:IC8.15
B_REGISTER1:N$30: B_REGISTER1:D2.10 B_REGISTER1:IC8.14
B_REGISTER1:VCC: B_REGISTER1:IC2.16 B_REGISTER1:IC3.16 B_REGISTER1:IC7.16 B_REGISTER1:IC8.16
CF: ALU1:IC5.4 CONTROL_LOGIC1:IC1.7 CONTROL_LOGIC1:IC2.7
CLK: A_REGISTER1:IC2.7 A_REGISTER1:IC3.7 ALU1:IC5.7 B_REGISTER1:IC2.7 B_REGISTER1:IC3.7 CLK1:IC1.8 CLK1:LED1.A CONTROL_LOGIC1:V1.2 INST_REGISTER1:IC2.7 INST_REGISTER1:IC3.7 PROGRAM-COUNTER1:IC1.7 PROGRAM-COUNTER1:IC2.7 PROGRAM-COUNTER1:IC4.7 PROGRAM-COUNTER1:IC5.7 PROGRAM-COUNTER1:V1.2 PROGRAM-COUNTER1:V2.2 PROGRAM-COUNTER1:V3.2 PROGRAM-COUNTER1:V4.2
CLK1:ACLK: CLK1:IC1.1 CLK1:IC5.3
CLK1:AMS: CLK1:IC1.5 CLK1:IC4.3
CLK1:MCLK: CLK1:IC1.2 CLK1:IC2.20 CLK1:IC3.3
CLK1:N$1: CLK1:IC4.2 CLK1:R5.1 CLK1:S2.1
CLK1:N$2: CLK1:IC3.2 CLK1:R3.1 CLK1:S1.NO
CLK1:N$3: CLK1:IC4.4 CLK1:R6.1 CLK1:S2.3
CLK1:N$4: CLK1:C3.1 CLK1:IC3.5
CLK1:N$5: CLK1:C5.1 CLK1:IC4.5
CLK1:N$6: CLK1:LED1.K CLK1:R13.2
CLK1:N$7: CLK1:C4.1 CLK1:IC3.6 CLK1:IC3.7 CLK1:R4.1
CLK1:N$8: CLK1:IC1.10 CLK1:IC2.2
CLK1:N$9: CLK1:IC5.7 CLK1:R1.1 CLK1:R2.2
CLK1:N$10: CLK1:C2.1 CLK1:IC5.5
CLK1:N$11: CLK1:R2.1 CLK1:R7.2
CLK1:N$12: CLK1:IC1.6 CLK1:IC6.16
CLK1:N$13: CLK1:IC1.3 CLK1:IC6.1
CLK1:N$14: CLK1:IC1.9 CLK1:IC6.2
CLK1:N$17: CLK1:IC1.4 CLK1:IC2.1
CLK1:NC: CLK1:IC4.7
CLK1:TRIGGER: CLK1:C1.1 CLK1:IC5.2 CLK1:IC5.6 CLK1:R7.3
CLR: A_REGISTER1:IC2.15 A_REGISTER1:IC3.15 ALU1:IC5.15 B_REGISTER1:IC2.15 B_REGISTER1:IC3.15 CONTROL_LOGIC1:IC5.8 INST_REGISTER1:IC2.15 INST_REGISTER1:IC3.15 PROGRAM-COUNTER1:IC1.15 PROGRAM-COUNTER1:IC2.15 PROGRAM-COUNTER1:IC4.15 PROGRAM-COUNTER1:IC5.15
CONTROL_LOGIC1:+UB: CONTROL_LOGIC1:V1.16
CONTROL_LOGIC1:-UB: CONTROL_LOGIC1:V1.8
CONTROL_LOGIC1:N$1: CONTROL_LOGIC1:IC1.19 CONTROL_LOGIC1:IC2.19 CONTROL_LOGIC1:IC3.1 CONTROL_LOGIC1:V1.12
CONTROL_LOGIC1:N$2: CONTROL_LOGIC1:IC1.22 CONTROL_LOGIC1:IC2.22 CONTROL_LOGIC1:IC3.2 CONTROL_LOGIC1:V1.13
CONTROL_LOGIC1:N$3: CONTROL_LOGIC1:IC1.23 CONTROL_LOGIC1:IC2.23 CONTROL_LOGIC1:IC3.3 CONTROL_LOGIC1:V1.14
CONTROL_LOGIC1:N$4: CONTROL_LOGIC1:IC3.10 CONTROL_LOGIC1:IC5.2
CONTROL_LOGIC1:N$5: CONTROL_LOGIC1:IC3.15 CONTROL_LOGIC1:LED9.A
CONTROL_LOGIC1:N$6: CONTROL_LOGIC1:IC3.14 CONTROL_LOGIC1:LED10.A
CONTROL_LOGIC1:N$7: CONTROL_LOGIC1:IC5.3 CONTROL_LOGIC1:IC5.12 CONTROL_LOGIC1:IC5.13
CONTROL_LOGIC1:N$8: CONTROL_LOGIC1:IC5.11 CONTROL_LOGIC1:V1.1
CONTROL_LOGIC1:N$9: CONTROL_LOGIC1:IC3.13 CONTROL_LOGIC1:LED11.A
CONTROL_LOGIC1:N$10: CONTROL_LOGIC1:IC3.12 CONTROL_LOGIC1:LED12.A
CONTROL_LOGIC1:N$11: CONTROL_LOGIC1:IC3.11 CONTROL_LOGIC1:LED13.A
CONTROL_LOGIC1:N$12: CONTROL_LOGIC1:LED6.K CONTROL_LOGIC1:R9.2
CONTROL_LOGIC1:N$13: CONTROL_LOGIC1:LED7.K CONTROL_LOGIC1:R10.2
CONTROL_LOGIC1:N$14: CONTROL_LOGIC1:LED8.K CONTROL_LOGIC1:R11.2
CONTROL_LOGIC1:N$15: CONTROL_LOGIC1:LED17.K CONTROL_LOGIC1:R12.2
CONTROL_LOGIC1:N$16: CONTROL_LOGIC1:LED18.K CONTROL_LOGIC1:R13.2
CONTROL_LOGIC1:N$17: CONTROL_LOGIC1:LED19.K CONTROL_LOGIC1:R14.2
CONTROL_LOGIC1:N$18: CONTROL_LOGIC1:LED20.K CONTROL_LOGIC1:R15.2
CONTROL_LOGIC1:N$19: CONTROL_LOGIC1:LED21.K CONTROL_LOGIC1:R16.2
CONTROL_LOGIC1:N$20: CONTROL_LOGIC1:LED1.K CONTROL_LOGIC1:R1.2
CONTROL_LOGIC1:N$21: CONTROL_LOGIC1:LED2.K CONTROL_LOGIC1:R2.2
CONTROL_LOGIC1:N$22: CONTROL_LOGIC1:LED3.K CONTROL_LOGIC1:R3.2
CONTROL_LOGIC1:N$23: CONTROL_LOGIC1:LED4.K CONTROL_LOGIC1:R4.2
CONTROL_LOGIC1:N$24: CONTROL_LOGIC1:LED5.K CONTROL_LOGIC1:R5.2
CONTROL_LOGIC1:N$25: CONTROL_LOGIC1:LED14.K CONTROL_LOGIC1:R6.2
CONTROL_LOGIC1:N$26: CONTROL_LOGIC1:LED15.K CONTROL_LOGIC1:R7.2
CONTROL_LOGIC1:N$27: CONTROL_LOGIC1:IC2.17 CONTROL_LOGIC1:LED6.A
CONTROL_LOGIC1:N$28: CONTROL_LOGIC1:LED16.K CONTROL_LOGIC1:R8.2
CONTROL_LOGIC1:N$29: CONTROL_LOGIC1:LED9.K CONTROL_LOGIC1:R17.2
CONTROL_LOGIC1:N$30: CONTROL_LOGIC1:LED10.K CONTROL_LOGIC1:R18.2
CONTROL_LOGIC1:N$31: CONTROL_LOGIC1:LED11.K CONTROL_LOGIC1:R19.2
CONTROL_LOGIC1:N$32: CONTROL_LOGIC1:LED12.K CONTROL_LOGIC1:R20.2
CONTROL_LOGIC1:N$33: CONTROL_LOGIC1:LED13.K CONTROL_LOGIC1:R21.2
CONTROL_LOGIC1:NNOW: CONTROL_LOGIC1:IC2.16 CONTROL_LOGIC1:LED7.A
CONTROL_LOGIC1:NNOW2: CONTROL_LOGIC1:IC2.15 CONTROL_LOGIC1:LED8.A
COUNT: CONTROL_LOGIC1:IC2.14 CONTROL_LOGIC1:LED17.A PROGRAM-COUNTER1:V1.7 PROGRAM-COUNTER1:V1.10 PROGRAM-COUNTER1:V2.7 PROGRAM-COUNTER1:V2.10 PROGRAM-COUNTER1:V3.7 PROGRAM-COUNTER1:V3.10 PROGRAM-COUNTER1:V4.7 PROGRAM-COUNTER1:V4.10
GND: 1.1 2.1 3.1 5.1 11.2 12.2 13.2 15.2 A_REGISTER1:D1.3 A_REGISTER1:D1.5 A_REGISTER1:D1.8 A_REGISTER1:D2.3 A_REGISTER1:D2.5 A_REGISTER1:D2.8 A_REGISTER1:IC1.10 A_REGISTER1:IC2.1 A_REGISTER1:IC2.2 A_REGISTER1:IC2.8 A_REGISTER1:IC3.1 A_REGISTER1:IC3.2 A_REGISTER1:IC3.8 A_REGISTER1:IC7.3 A_REGISTER1:IC7.4 A_REGISTER1:IC7.5 A_REGISTER1:IC7.8 A_REGISTER1:IC8.3 A_REGISTER1:IC8.4 A_REGISTER1:IC8.5 A_REGISTER1:IC8.8 ALU1:D1.3 ALU1:D1.5 ALU1:D1.8 ALU1:D2.3 ALU1:D2.5 ALU1:D2.8 ALU1:IC1.7 ALU1:IC2.7 ALU1:IC3.8 ALU1:IC4.8 ALU1:IC5.1 ALU1:IC5.2 ALU1:IC5.8 ALU1:IC6.10 ALU1:IC7.3 ALU1:IC7.4 ALU1:IC7.5 ALU1:IC7.8 ALU1:IC8.3 ALU1:IC8.4 ALU1:IC8.5 ALU1:IC8.8 B_REGISTER1:D1.3 B_REGISTER1:D1.5 B_REGISTER1:D1.8 B_REGISTER1:D2.3 B_REGISTER1:D2.5 B_REGISTER1:D2.8 B_REGISTER1:IC2.1 B_REGISTER1:IC2.2 B_REGISTER1:IC2.8 B_REGISTER1:IC3.1 B_REGISTER1:IC3.2 B_REGISTER1:IC3.8 B_REGISTER1:IC7.3 B_REGISTER1:IC7.4 B_REGISTER1:IC7.5 B_REGISTER1:IC7.8 B_REGISTER1:IC8.3 B_REGISTER1:IC8.4 B_REGISTER1:IC8.5 B_REGISTER1:IC8.8 C1.2 CLK1:C1.2 CLK1:C2.2 CLK1:C3.2 CLK1:C4.2 CLK1:C5.2 CLK1:IC1.7 CLK1:IC2.4 CLK1:IC2.5 CLK1:IC2.6 CLK1:IC2.7 CLK1:IC3.1 CLK1:IC4.1 CLK1:IC4.6 CLK1:IC5.1 CLK1:IC6.4 CLK1:IC6.5 CLK1:R13.1 CLK1:S1.1A CLK1:S1.1B CLK1:S2.2 CONTROL_LOGIC1:IC1.12 CONTROL_LOGIC1:IC1.20 CONTROL_LOGIC1:IC1.21 CONTROL_LOGIC1:IC2.12 CONTROL_LOGIC1:IC2.20 CONTROL_LOGIC1:IC2.21 CONTROL_LOGIC1:IC3.4 CONTROL_LOGIC1:IC3.5 CONTROL_LOGIC1:IC3.8 CONTROL_LOGIC1:IC5.4 CONTROL_LOGIC1:IC5.5 CONTROL_LOGIC1:IC5.7 CONTROL_LOGIC1:R1.1 CONTROL_LOGIC1:R2.1 CONTROL_LOGIC1:R3.1 CONTROL_LOGIC1:R4.1 CONTROL_LOGIC1:R5.1 CONTROL_LOGIC1:R6.1 CONTROL_LOGIC1:R7.1 CONTROL_LOGIC1:R8.1 CONTROL_LOGIC1:R9.1 CONTROL_LOGIC1:R10.1 CONTROL_LOGIC1:R11.1 CONTROL_LOGIC1:R12.1 CONTROL_LOGIC1:R13.1 CONTROL_LOGIC1:R14.1 CONTROL_LOGIC1:R15.1 CONTROL_LOGIC1:R16.1 CONTROL_LOGIC1:R17.1 CONTROL_LOGIC1:R18.1 CONTROL_LOGIC1:R19.1 CONTROL_LOGIC1:R20.1 CONTROL_LOGIC1:R21.1 CONTROL_LOGIC1:S1.1B INST_REGISTER1:IC1.7 INST_REGISTER1:IC2.1 INST_REGISTER1:IC2.2 INST_REGISTER1:IC2.8 INST_REGISTER1:IC3.1 INST_REGISTER1:IC3.2 INST_REGISTER1:IC3.8 INST_REGISTER1:IC4.7 INST_REGISTER1:R9.1 INST_REGISTER1:R10.1 INST_REGISTER1:R11.1 INST_REGISTER1:R12.1 INST_REGISTER1:R13.1 INST_REGISTER1:R14.1 INST_REGISTER1:R15.1 INST_REGISTER1:R16.1 PROGRAM-COUNTER1:D1.3 PROGRAM-COUNTER1:D1.5 PROGRAM-COUNTER1:D1.8 PROGRAM-COUNTER1:D2.3 PROGRAM-COUNTER1:D2.5 PROGRAM-COUNTER1:D2.8 PROGRAM-COUNTER1:D3.3 PROGRAM-COUNTER1:D3.5 PROGRAM-COUNTER1:D3.8 PROGRAM-COUNTER1:D4.3 PROGRAM-COUNTER1:D4.5 PROGRAM-COUNTER1:D4.8 PROGRAM-COUNTER1:IC1.1 PROGRAM-COUNTER1:IC1.2 PROGRAM-COUNTER1:IC1.8 PROGRAM-COUNTER1:IC2.1 PROGRAM-COUNTER1:IC2.2 PROGRAM-COUNTER1:IC2.8 PROGRAM-COUNTER1:IC3.7 PROGRAM-COUNTER1:IC4.1 PROGRAM-COUNTER1:IC4.2 PROGRAM-COUNTER1:IC4.8 PROGRAM-COUNTER1:IC5.1 PROGRAM-COUNTER1:IC5.2 PROGRAM-COUNTER1:IC5.8 PROGRAM-COUNTER1:IC7.3 PROGRAM-COUNTER1:IC7.4 PROGRAM-COUNTER1:IC7.5 PROGRAM-COUNTER1:IC7.8 PROGRAM-COUNTER1:IC8.3 PROGRAM-COUNTER1:IC8.4 PROGRAM-COUNTER1:IC8.5 PROGRAM-COUNTER1:IC8.8 PROGRAM-COUNTER1:IC9.3 PROGRAM-COUNTER1:IC9.4 PROGRAM-COUNTER1:IC9.5 PROGRAM-COUNTER1:IC9.8 PROGRAM-COUNTER1:IC10.3 PROGRAM-COUNTER1:IC10.4 PROGRAM-COUNTER1:IC10.5 PROGRAM-COUNTER1:IC10.8 PROGRAM-COUNTER1:R1.1 PROGRAM-COUNTER1:R2.1 PROGRAM-COUNTER1:R3.1 PROGRAM-COUNTER1:R4.1 PROGRAM-COUNTER1:R5.1 PROGRAM-COUNTER1:R6.1 PROGRAM-COUNTER1:R7.1 PROGRAM-COUNTER1:R8.1 PROGRAM-COUNTER1:R9.1 PROGRAM-COUNTER1:R10.1 PROGRAM-COUNTER1:R11.1 PROGRAM-COUNTER1:R12.1 PROGRAM-COUNTER1:R13.1 PROGRAM-COUNTER1:R14.1 PROGRAM-COUNTER1:R15.1 PROGRAM-COUNTER1:R16.1 R9.1 R10.1 R11.1 R12.1 R13.1 R14.1 R15.1 R16.1 X1.2
HLT: CLK1:IC2.19 CONTROL_LOGIC1:IC1.9 CONTROL_LOGIC1:LED16.A
INST_REGISTER1:8B_9: INST_REGISTER1:IC2.11
INST_REGISTER1:8B_10: INST_REGISTER1:IC2.12
INST_REGISTER1:8B_11: INST_REGISTER1:IC2.13
INST_REGISTER1:8B_12: INST_REGISTER1:IC2.14
INST_REGISTER1:INST_2: INST_REGISTER1:IC3.4 INST_REGISTER1:LED10.A
INST_REGISTER1:N$1: INST_REGISTER1:LED9.K INST_REGISTER1:R9.2
INST_REGISTER1:N$2: INST_REGISTER1:LED10.K INST_REGISTER1:R10.2
INST_REGISTER1:N$3: INST_REGISTER1:LED11.K INST_REGISTER1:R11.2
INST_REGISTER1:N$4: INST_REGISTER1:IC1.1 INST_REGISTER1:IC4.2
INST_REGISTER1:N$5: INST_REGISTER1:LED12.K INST_REGISTER1:R12.2
INST_REGISTER1:N$6: INST_REGISTER1:LED13.K INST_REGISTER1:R13.2
INST_REGISTER1:N$7: INST_REGISTER1:LED14.K INST_REGISTER1:R14.2
INST_REGISTER1:N$8: INST_REGISTER1:LED15.K INST_REGISTER1:R15.2
INST_REGISTER1:N$9: INST_REGISTER1:LED16.K INST_REGISTER1:R16.2
INST_REGISTER1:SLC_REG: INST_REGISTER1:IC1.4 INST_REGISTER1:IC3.3 INST_REGISTER1:IC4.1 INST_REGISTER1:LED9.A
INST_REGISTER1:VCC: INST_REGISTER1:IC1.14 INST_REGISTER1:IC2.16 INST_REGISTER1:IC3.16 INST_REGISTER1:IC4.14
N$1: PROGRAM-COUNTER1:IC7.6 PROGRAM-COUNTER1:V2.11 RAM1:IC15.2
N$2: PROGRAM-COUNTER1:IC7.2 PROGRAM-COUNTER1:V2.12
N$3: PROGRAM-COUNTER1:IC7.1 PROGRAM-COUNTER1:V2.13 RAM1:IC15.11
N$4: PROGRAM-COUNTER1:IC7.7 PROGRAM-COUNTER1:V2.14 RAM1:IC15.14
N$5: PROGRAM-COUNTER1:IC8.6 PROGRAM-COUNTER1:V1.11 RAM1:IC16.2
N$6: PROGRAM-COUNTER1:IC8.2 PROGRAM-COUNTER1:V1.12 RAM1:IC16.5
N$7: PROGRAM-COUNTER1:IC8.1 PROGRAM-COUNTER1:V1.13 RAM1:IC16.11
N$8: PROGRAM-COUNTER1:IC8.7 PROGRAM-COUNTER1:V1.14 RAM1:IC16.14
N$9: PROGRAM-COUNTER1:IC9.6 PROGRAM-COUNTER1:V3.11 RAM1:IC17.2
N$10: PROGRAM-COUNTER1:IC9.2 PROGRAM-COUNTER1:V3.12 RAM1:IC17.5
N$11: PROGRAM-COUNTER1:IC9.1 PROGRAM-COUNTER1:V3.13 RAM1:IC17.11
N$12: PROGRAM-COUNTER1:IC9.7 PROGRAM-COUNTER1:V3.14 RAM1:IC17.14
N$13: PROGRAM-COUNTER1:IC10.6 PROGRAM-COUNTER1:V4.11 RAM1:IC18.2
N$14: PROGRAM-COUNTER1:IC10.2 PROGRAM-COUNTER1:V4.12 RAM1:IC18.5
N$15: PROGRAM-COUNTER1:IC10.1 PROGRAM-COUNTER1:V4.13 RAM1:IC18.11
N$16: PROGRAM-COUNTER1:IC10.7 PROGRAM-COUNTER1:V4.14 RAM1:IC18.14
N$17: A_REGISTER1:IC1.2 A_REGISTER1:IC3.3 A_REGISTER1:IC7.6 ALU1:IC4.5
N$18: A_REGISTER1:IC1.3 A_REGISTER1:IC3.4 A_REGISTER1:IC7.2 ALU1:IC4.3
N$19: A_REGISTER1:IC1.4 A_REGISTER1:IC3.5 A_REGISTER1:IC7.1 ALU1:IC4.14
N$20: A_REGISTER1:IC1.5 A_REGISTER1:IC1.6 A_REGISTER1:IC2.3 A_REGISTER1:IC3.6 A_REGISTER1:IC7.7 A_REGISTER1:IC8.6 ALU1:IC3.5 ALU1:IC4.12
N$21: A_REGISTER1:IC1.7 A_REGISTER1:IC2.4 A_REGISTER1:IC8.2 ALU1:IC3.3
N$22: A_REGISTER1:IC1.8 A_REGISTER1:IC2.5 A_REGISTER1:IC8.1 ALU1:IC3.14
N$23: A_REGISTER1:IC1.9 A_REGISTER1:IC2.6 A_REGISTER1:IC8.7 ALU1:IC3.12
N$24: ALU1:IC2.12 B_REGISTER1:IC3.3 B_REGISTER1:IC7.6
N$25: ALU1:IC2.9 B_REGISTER1:IC3.4 B_REGISTER1:IC7.2
N$26: ALU1:IC2.4 B_REGISTER1:IC3.5 B_REGISTER1:IC7.1
N$27: ALU1:IC2.1 B_REGISTER1:IC3.6 B_REGISTER1:IC7.7
N$28: ALU1:IC1.12 B_REGISTER1:IC2.3 B_REGISTER1:IC8.6
N$29: ALU1:IC1.9 B_REGISTER1:IC2.4 B_REGISTER1:IC8.2
N$30: ALU1:IC1.4 B_REGISTER1:IC2.5 B_REGISTER1:IC8.1
N$31: ALU1:IC1.1 B_REGISTER1:IC2.6 B_REGISTER1:IC8.7
N$32: CONTROL_LOGIC1:IC1.6 CONTROL_LOGIC1:IC2.6 INST_REGISTER1:IC3.5 INST_REGISTER1:LED11.A
N$33: CONTROL_LOGIC1:IC1.5 CONTROL_LOGIC1:IC2.5 INST_REGISTER1:IC3.6 INST_REGISTER1:LED12.A
N$34: CONTROL_LOGIC1:IC1.4 CONTROL_LOGIC1:IC2.4 INST_REGISTER1:IC2.3 INST_REGISTER1:LED13.A
N$35: CONTROL_LOGIC1:IC1.3 CONTROL_LOGIC1:IC2.3 INST_REGISTER1:IC2.4 INST_REGISTER1:LED14.A
N$36: CONTROL_LOGIC1:IC1.2 CONTROL_LOGIC1:IC2.2 INST_REGISTER1:IC2.5 INST_REGISTER1:LED15.A
N$37: CONTROL_LOGIC1:IC1.1 CONTROL_LOGIC1:IC2.1 INST_REGISTER1:IC2.6 INST_REGISTER1:LED16.A
N$38: L1.K R9.2
N$39: L2.K R10.2
N$40: L3.K R11.2
N$41: L4.K R12.2
N$42: L5.K R13.2
N$43: L6.K R14.2
N$44: L7.K R15.2
N$45: L8.K R16.2
PC_LE: CONTROL_LOGIC1:IC1.16 CONTROL_LOGIC1:LED2.A PROGRAM-COUNTER1:V1.9 PROGRAM-COUNTER1:V2.9 PROGRAM-COUNTER1:V3.9 PROGRAM-COUNTER1:V4.9
PC_LRS: CONTROL_LOGIC1:IC1.17 CONTROL_LOGIC1:LED1.A PROGRAM-COUNTER1:IC1.9 PROGRAM-COUNTER1:IC1.10 PROGRAM-COUNTER1:IC2.9 PROGRAM-COUNTER1:IC2.10 PROGRAM-COUNTER1:IC3.1
PROGRAM-COUNTER1:+UB: PROGRAM-COUNTER1:V1.16 PROGRAM-COUNTER1:V2.16 PROGRAM-COUNTER1:V3.16 PROGRAM-COUNTER1:V4.16
PROGRAM-COUNTER1:-UB: PROGRAM-COUNTER1:V1.8 PROGRAM-COUNTER1:V2.8 PROGRAM-COUNTER1:V3.8 PROGRAM-COUNTER1:V4.8
PROGRAM-COUNTER1:N$1: PROGRAM-COUNTER1:IC1.6 PROGRAM-COUNTER1:LED13.A PROGRAM-COUNTER1:V1.6
PROGRAM-COUNTER1:N$2: PROGRAM-COUNTER1:IC2.6 PROGRAM-COUNTER1:LED9.A PROGRAM-COUNTER1:V2.6
PROGRAM-COUNTER1:N$3: PROGRAM-COUNTER1:IC2.5 PROGRAM-COUNTER1:LED10.A PROGRAM-COUNTER1:V2.5
PROGRAM-COUNTER1:N$4: PROGRAM-COUNTER1:IC2.4 PROGRAM-COUNTER1:LED11.A PROGRAM-COUNTER1:V2.4
PROGRAM-COUNTER1:N$5: PROGRAM-COUNTER1:IC2.3 PROGRAM-COUNTER1:LED12.A PROGRAM-COUNTER1:V2.3
PROGRAM-COUNTER1:N$6: PROGRAM-COUNTER1:IC1.5 PROGRAM-COUNTER1:LED14.A PROGRAM-COUNTER1:V1.5
PROGRAM-COUNTER1:N$7: PROGRAM-COUNTER1:IC1.4 PROGRAM-COUNTER1:LED15.A PROGRAM-COUNTER1:V1.4
PROGRAM-COUNTER1:N$8: PROGRAM-COUNTER1:IC1.3 PROGRAM-COUNTER1:LED16.A PROGRAM-COUNTER1:V1.3
PROGRAM-COUNTER1:N$9: PROGRAM-COUNTER1:D1.7 PROGRAM-COUNTER1:IC7.13
PROGRAM-COUNTER1:N$10: PROGRAM-COUNTER1:D1.6 PROGRAM-COUNTER1:IC7.12
PROGRAM-COUNTER1:N$11: PROGRAM-COUNTER1:D1.4 PROGRAM-COUNTER1:IC7.11
PROGRAM-COUNTER1:N$12: PROGRAM-COUNTER1:D1.2 PROGRAM-COUNTER1:IC7.10
PROGRAM-COUNTER1:N$13: PROGRAM-COUNTER1:D1.1 PROGRAM-COUNTER1:IC7.9
PROGRAM-COUNTER1:N$14: PROGRAM-COUNTER1:D1.9 PROGRAM-COUNTER1:IC7.15
PROGRAM-COUNTER1:N$15: PROGRAM-COUNTER1:D1.10 PROGRAM-COUNTER1:IC7.14
PROGRAM-COUNTER1:N$16: PROGRAM-COUNTER1:D2.7 PROGRAM-COUNTER1:IC8.13
PROGRAM-COUNTER1:N$17: PROGRAM-COUNTER1:IC4.6 PROGRAM-COUNTER1:LED1.A PROGRAM-COUNTER1:V3.6
PROGRAM-COUNTER1:N$18: PROGRAM-COUNTER1:IC4.5 PROGRAM-COUNTER1:LED2.A PROGRAM-COUNTER1:V3.5
PROGRAM-COUNTER1:N$19: PROGRAM-COUNTER1:IC4.4 PROGRAM-COUNTER1:LED3.A PROGRAM-COUNTER1:V3.4
PROGRAM-COUNTER1:N$20: PROGRAM-COUNTER1:IC4.3 PROGRAM-COUNTER1:LED4.A PROGRAM-COUNTER1:V3.3
PROGRAM-COUNTER1:N$21: PROGRAM-COUNTER1:D2.6 PROGRAM-COUNTER1:IC8.12
PROGRAM-COUNTER1:N$22: PROGRAM-COUNTER1:D2.4 PROGRAM-COUNTER1:IC8.11
PROGRAM-COUNTER1:N$23: PROGRAM-COUNTER1:D2.2 PROGRAM-COUNTER1:IC8.10
PROGRAM-COUNTER1:N$24: PROGRAM-COUNTER1:D2.1 PROGRAM-COUNTER1:IC8.9
PROGRAM-COUNTER1:N$25: PROGRAM-COUNTER1:IC5.6 PROGRAM-COUNTER1:LED5.A PROGRAM-COUNTER1:V4.6
PROGRAM-COUNTER1:N$26: PROGRAM-COUNTER1:IC5.5 PROGRAM-COUNTER1:LED6.A PROGRAM-COUNTER1:V4.5
PROGRAM-COUNTER1:N$27: PROGRAM-COUNTER1:IC5.4 PROGRAM-COUNTER1:LED7.A PROGRAM-COUNTER1:V4.4
PROGRAM-COUNTER1:N$28: PROGRAM-COUNTER1:IC5.3 PROGRAM-COUNTER1:LED8.A PROGRAM-COUNTER1:V4.3
PROGRAM-COUNTER1:N$29: PROGRAM-COUNTER1:D2.9 PROGRAM-COUNTER1:IC8.15
PROGRAM-COUNTER1:N$30: PROGRAM-COUNTER1:D2.10 PROGRAM-COUNTER1:IC8.14
PROGRAM-COUNTER1:N$31: PROGRAM-COUNTER1:D3.7 PROGRAM-COUNTER1:IC9.13
PROGRAM-COUNTER1:N$32: PROGRAM-COUNTER1:D3.6 PROGRAM-COUNTER1:IC9.12
PROGRAM-COUNTER1:N$33: PROGRAM-COUNTER1:D3.4 PROGRAM-COUNTER1:IC9.11
PROGRAM-COUNTER1:N$34: PROGRAM-COUNTER1:D3.2 PROGRAM-COUNTER1:IC9.10
PROGRAM-COUNTER1:N$35: PROGRAM-COUNTER1:D3.1 PROGRAM-COUNTER1:IC9.9
PROGRAM-COUNTER1:N$36: PROGRAM-COUNTER1:D3.9 PROGRAM-COUNTER1:IC9.15
PROGRAM-COUNTER1:N$37: PROGRAM-COUNTER1:D3.10 PROGRAM-COUNTER1:IC9.14
PROGRAM-COUNTER1:N$38: PROGRAM-COUNTER1:D4.7 PROGRAM-COUNTER1:IC10.13
PROGRAM-COUNTER1:N$39: PROGRAM-COUNTER1:D4.6 PROGRAM-COUNTER1:IC10.12
PROGRAM-COUNTER1:N$40: PROGRAM-COUNTER1:D4.4 PROGRAM-COUNTER1:IC10.11
PROGRAM-COUNTER1:N$41: PROGRAM-COUNTER1:D4.2 PROGRAM-COUNTER1:IC10.10
PROGRAM-COUNTER1:N$42: PROGRAM-COUNTER1:D4.1 PROGRAM-COUNTER1:IC10.9
PROGRAM-COUNTER1:N$43: PROGRAM-COUNTER1:D4.9 PROGRAM-COUNTER1:IC10.15
PROGRAM-COUNTER1:N$44: PROGRAM-COUNTER1:D4.10 PROGRAM-COUNTER1:IC10.14
PROGRAM-COUNTER1:N$45: PROGRAM-COUNTER1:LED9.K PROGRAM-COUNTER1:R9.2
PROGRAM-COUNTER1:N$46: PROGRAM-COUNTER1:LED10.K PROGRAM-COUNTER1:R10.2
PROGRAM-COUNTER1:N$47: PROGRAM-COUNTER1:LED11.K PROGRAM-COUNTER1:R11.2
PROGRAM-COUNTER1:N$48: PROGRAM-COUNTER1:LED12.K PROGRAM-COUNTER1:R12.2
PROGRAM-COUNTER1:N$49: PROGRAM-COUNTER1:LED13.K PROGRAM-COUNTER1:R13.2
PROGRAM-COUNTER1:N$50: PROGRAM-COUNTER1:LED14.K PROGRAM-COUNTER1:R14.2
PROGRAM-COUNTER1:N$51: PROGRAM-COUNTER1:LED15.K PROGRAM-COUNTER1:R15.2
PROGRAM-COUNTER1:N$52: PROGRAM-COUNTER1:LED16.K PROGRAM-COUNTER1:R16.2
PROGRAM-COUNTER1:N$53: PROGRAM-COUNTER1:LED1.K PROGRAM-COUNTER1:R1.2
PROGRAM-COUNTER1:N$54: PROGRAM-COUNTER1:LED2.K PROGRAM-COUNTER1:R2.2
PROGRAM-COUNTER1:N$55: PROGRAM-COUNTER1:LED3.K PROGRAM-COUNTER1:R3.2
PROGRAM-COUNTER1:N$56: PROGRAM-COUNTER1:LED4.K PROGRAM-COUNTER1:R4.2
PROGRAM-COUNTER1:N$57: PROGRAM-COUNTER1:LED5.K PROGRAM-COUNTER1:R5.2
PROGRAM-COUNTER1:N$58: PROGRAM-COUNTER1:LED6.K PROGRAM-COUNTER1:R6.2
PROGRAM-COUNTER1:N$59: PROGRAM-COUNTER1:LED7.K PROGRAM-COUNTER1:R7.2
PROGRAM-COUNTER1:N$60: PROGRAM-COUNTER1:LED8.K PROGRAM-COUNTER1:R8.2
PROGRAM-COUNTER1:VCC: PROGRAM-COUNTER1:IC1.16 PROGRAM-COUNTER1:IC2.16 PROGRAM-COUNTER1:IC3.14 PROGRAM-COUNTER1:IC4.16 PROGRAM-COUNTER1:IC5.16 PROGRAM-COUNTER1:IC7.16 PROGRAM-COUNTER1:IC8.16 PROGRAM-COUNTER1:IC9.16 PROGRAM-COUNTER1:IC10.16
PROGRAM-COUNTER1:|LRS: PROGRAM-COUNTER1:IC3.2 PROGRAM-COUNTER1:IC4.9 PROGRAM-COUNTER1:IC4.10 PROGRAM-COUNTER1:IC5.9 PROGRAM-COUNTER1:IC5.10
RAM1:16B_15: RAM1:IC15.5
RAM1:+UB: RAM1:V1.14
RAM1:-UB: RAM1:V1.7
RAM1:A/M: RAM1:IC4.1 RAM1:IC5.1 RAM1:IC6.1 RAM1:IC7.1 RAM1:S2.2
RAM1:CLK: RAM1:IC2.7 RAM1:IC3.7 RAM1:IC12.7 RAM1:IC13.7
RAM1:CLR: RAM1:IC2.15 RAM1:IC3.15 RAM1:IC12.15 RAM1:IC13.15
RAM1:GND: RAM1:D1.3 RAM1:D1.5 RAM1:D1.8 RAM1:D2.3 RAM1:D2.5 RAM1:D2.8 RAM1:D3.3 RAM1:D3.5 RAM1:D3.8 RAM1:D4.3 RAM1:D4.5 RAM1:D4.8 RAM1:IC1.14 RAM1:IC1.20 RAM1:IC2.1 RAM1:IC2.2 RAM1:IC2.8 RAM1:IC3.1 RAM1:IC3.2 RAM1:IC3.8 RAM1:IC4.8 RAM1:IC4.15 RAM1:IC5.8 RAM1:IC5.15 RAM1:IC6.8 RAM1:IC6.15 RAM1:IC7.8 RAM1:IC7.15 RAM1:IC8.3 RAM1:IC8.4 RAM1:IC8.5 RAM1:IC8.6 RAM1:IC8.8 RAM1:IC9.3 RAM1:IC9.4 RAM1:IC9.5 RAM1:IC9.8 RAM1:IC10.3 RAM1:IC10.4 RAM1:IC10.5 RAM1:IC10.8 RAM1:IC11.3 RAM1:IC11.4 RAM1:IC11.5 RAM1:IC11.8 RAM1:IC12.1 RAM1:IC12.2 RAM1:IC12.8 RAM1:IC13.1 RAM1:IC13.2 RAM1:IC13.8 RAM1:IC14.7 RAM1:IC15.8 RAM1:IC16.8 RAM1:IC16.15 RAM1:IC17.8 RAM1:IC17.15 RAM1:IC18.8 RAM1:IC18.15 RAM1:R9.1 RAM1:R10.1 RAM1:R11.1 RAM1:R12.1 RAM1:R13.1 RAM1:R14.1 RAM1:R15.1 RAM1:R16.1 RAM1:S2.1
RAM1:N$1: RAM1:IC12.9 RAM1:IC12.10 RAM1:IC13.9 RAM1:IC13.10 RAM1:V1.6
RAM1:N$2: RAM1:IC2.9 RAM1:IC2.10 RAM1:IC3.9 RAM1:IC3.10 RAM1:V1.3
RAM1:N$3: RAM1:IC14.2 RAM1:V1.5
RAM1:N$4: RAM1:IC4.2 RAM1:IC15.4
RAM1:N$5: RAM1:IC4.5 RAM1:IC15.7
RAM1:N$6: RAM1:IC4.11 RAM1:IC15.9
RAM1:N$7: RAM1:IC4.14 RAM1:IC15.12
RAM1:N$8: RAM1:IC5.2 RAM1:IC16.4
RAM1:N$9: RAM1:IC5.5 RAM1:IC16.7
RAM1:N$10: RAM1:IC5.11 RAM1:IC16.9
RAM1:N$11: RAM1:IC5.14 RAM1:IC16.12
RAM1:N$12: RAM1:IC6.2 RAM1:IC17.4
RAM1:N$13: RAM1:IC6.5 RAM1:IC17.7
RAM1:N$14: RAM1:IC6.11 RAM1:IC17.9
RAM1:N$15: RAM1:IC6.14 RAM1:IC17.12
RAM1:N$16: RAM1:IC7.2 RAM1:IC18.4
RAM1:N$17: RAM1:IC7.5 RAM1:IC18.7
RAM1:N$18: RAM1:IC7.11 RAM1:IC18.9
RAM1:N$19: RAM1:IC7.14 RAM1:IC18.12
RAM1:N$20: RAM1:IC4.3 RAM1:JP1.1
RAM1:N$21: RAM1:IC4.6 RAM1:JP2.1
RAM1:N$22: RAM1:IC4.10 RAM1:JP3.1
RAM1:N$23: RAM1:IC4.13 RAM1:JP4.1
RAM1:N$24: RAM1:IC5.3 RAM1:JP5.1
RAM1:N$25: RAM1:IC5.6 RAM1:JP6.1
RAM1:N$26: RAM1:IC5.10 RAM1:JP7.1
RAM1:N$27: RAM1:IC5.13 RAM1:JP8.1
RAM1:N$28: RAM1:IC6.3 RAM1:JP13.1
RAM1:N$29: RAM1:IC6.6 RAM1:JP14.1
RAM1:N$30: RAM1:IC6.10 RAM1:JP15.1
RAM1:N$31: RAM1:IC6.13 RAM1:JP16.1
RAM1:N$32: RAM1:IC7.3 RAM1:JP9.1
RAM1:N$33: RAM1:IC7.6 RAM1:JP10.1
RAM1:N$34: RAM1:IC7.10 RAM1:JP11.1
RAM1:N$35: RAM1:IC7.13 RAM1:JP12.1
RAM1:N$36: RAM1:IC1.21 RAM1:IC4.4 RAM1:IC11.7
RAM1:N$37: RAM1:IC1.23 RAM1:IC4.7 RAM1:IC11.1
RAM1:N$38: RAM1:D1.7 RAM1:IC8.13
RAM1:N$39: RAM1:D1.6 RAM1:IC8.12
RAM1:N$40: RAM1:IC1.24 RAM1:IC4.9 RAM1:IC11.2
RAM1:N$41: RAM1:IC1.25 RAM1:IC4.12 RAM1:IC11.6
RAM1:N$42: RAM1:IC1.26 RAM1:IC5.4 RAM1:IC10.7
RAM1:N$43: RAM1:IC1.1 RAM1:IC5.7 RAM1:IC10.1
RAM1:N$44: RAM1:IC1.2 RAM1:IC5.9 RAM1:IC10.2
RAM1:N$45: RAM1:IC1.3 RAM1:IC5.12 RAM1:IC10.6
RAM1:N$46: RAM1:IC1.4 RAM1:IC6.4 RAM1:IC9.7
RAM1:N$47: RAM1:IC1.5 RAM1:IC6.7 RAM1:IC9.1
RAM1:N$48: RAM1:IC1.6 RAM1:IC6.9 RAM1:IC9.2
RAM1:N$49: RAM1:IC1.7 RAM1:IC6.12 RAM1:IC9.6
RAM1:N$50: RAM1:IC1.8 RAM1:IC7.4 RAM1:IC8.7
RAM1:N$51: RAM1:IC1.9 RAM1:IC7.7 RAM1:IC8.1
RAM1:N$52: RAM1:IC1.10 RAM1:IC7.9 RAM1:IC8.2
RAM1:N$53: RAM1:IC2.3 RAM1:IC15.3
RAM1:N$54: RAM1:D1.4 RAM1:IC8.11
RAM1:N$55: RAM1:D1.2 RAM1:IC8.10
RAM1:N$56: RAM1:D1.1 RAM1:IC8.9
RAM1:N$57: RAM1:D1.9 RAM1:IC8.15
RAM1:N$58: RAM1:D1.10 RAM1:IC8.14
RAM1:N$59: RAM1:D2.7 RAM1:IC9.13
RAM1:N$60: RAM1:D2.6 RAM1:IC9.12
RAM1:N$61: RAM1:D2.4 RAM1:IC9.11
RAM1:N$62: RAM1:D2.2 RAM1:IC9.10
RAM1:N$63: RAM1:D2.1 RAM1:IC9.9
RAM1:N$64: RAM1:D2.9 RAM1:IC9.15
RAM1:N$65: RAM1:D2.10 RAM1:IC9.14
RAM1:N$66: RAM1:D3.7 RAM1:IC10.13
RAM1:N$67: RAM1:D3.6 RAM1:IC10.12
RAM1:N$68: RAM1:D3.4 RAM1:IC10.11
RAM1:N$69: RAM1:D3.2 RAM1:IC10.10
RAM1:N$70: RAM1:D3.1 RAM1:IC10.9
RAM1:N$71: RAM1:D3.9 RAM1:IC10.15
RAM1:N$72: RAM1:D3.10 RAM1:IC10.14
RAM1:N$73: RAM1:D4.7 RAM1:IC11.13
RAM1:N$74: RAM1:D4.6 RAM1:IC11.12
RAM1:N$75: RAM1:D4.4 RAM1:IC11.11
RAM1:N$76: RAM1:D4.2 RAM1:IC11.10
RAM1:N$77: RAM1:D4.1 RAM1:IC11.9
RAM1:N$78: RAM1:D4.9 RAM1:IC11.15
RAM1:N$79: RAM1:D4.10 RAM1:IC11.14
RAM1:N$80: RAM1:IC2.4 RAM1:IC15.6
RAM1:N$81: RAM1:IC2.5 RAM1:IC15.10
RAM1:N$82: RAM1:IC2.6 RAM1:IC15.13
RAM1:N$83: RAM1:IC3.3 RAM1:IC16.3
RAM1:N$84: RAM1:IC3.4 RAM1:IC16.6
RAM1:N$85: RAM1:IC3.5 RAM1:IC16.10
RAM1:N$86: RAM1:IC3.6 RAM1:IC16.13
RAM1:N$87: RAM1:IC12.3 RAM1:IC17.3
RAM1:N$88: RAM1:IC12.4 RAM1:IC17.6
RAM1:N$89: RAM1:IC12.5 RAM1:IC17.10
RAM1:N$90: RAM1:IC12.6 RAM1:IC17.13
RAM1:N$91: RAM1:IC13.3 RAM1:IC18.3
RAM1:N$92: RAM1:IC13.4 RAM1:IC18.6
RAM1:N$93: RAM1:IC13.5 RAM1:IC18.10
RAM1:N$94: RAM1:IC13.6 RAM1:IC18.13
RAM1:N$95: RAM1:LED9.K RAM1:R9.2
RAM1:N$96: RAM1:LED10.K RAM1:R10.2
RAM1:N$97: RAM1:LED11.K RAM1:R11.2
RAM1:N$98: RAM1:LED12.K RAM1:R12.2
RAM1:N$99: RAM1:LED13.K RAM1:R13.2
RAM1:N$100: RAM1:LED14.K RAM1:R14.2
RAM1:N$101: RAM1:LED15.K RAM1:R15.2
RAM1:N$102: RAM1:LED16.K RAM1:R16.2
RAM1:N$111: RAM1:IC15.15
RAM1:NC: RAM1:IC7.12
RAM1:VCC: RAM1:IC1.28 RAM1:IC2.16 RAM1:IC3.16 RAM1:IC4.16 RAM1:IC5.16 RAM1:IC6.16 RAM1:IC7.16 RAM1:IC8.16 RAM1:IC9.16 RAM1:IC10.16 RAM1:IC11.16 RAM1:IC12.16 RAM1:IC13.16 RAM1:IC14.14 RAM1:IC15.16 RAM1:IC16.16 RAM1:IC17.16 RAM1:IC18.16 RAM1:S2.3
RAM_LRS: CONTROL_LOGIC1:IC2.9 CONTROL_LOGIC1:LED21.A RAM1:IC14.1 RAM1:V1.2
SLC_ADDR: CONTROL_LOGIC1:IC2.10 CONTROL_LOGIC1:LED20.A RAM1:IC15.1 RAM1:IC16.1 RAM1:IC17.1 RAM1:IC18.1 RAM1:V1.1 RAM1:V1.4
SUB: ALU1:IC1.2 ALU1:IC1.5 ALU1:IC1.10 ALU1:IC1.13 ALU1:IC2.2 ALU1:IC2.5 ALU1:IC2.10 ALU1:IC2.13 ALU1:IC4.7
VCC: A_REGISTER1:IC1.1 A_REGISTER1:IC1.20 A_REGISTER1:IC2.16 A_REGISTER1:IC3.16 A_REGISTER1:IC7.16 A_REGISTER1:IC8.16 ALU1:IC1.14 ALU1:IC2.14 ALU1:IC3.16 ALU1:IC4.16 ALU1:IC5.16 ALU1:IC6.1 ALU1:IC6.20 ALU1:IC7.16 ALU1:IC8.16 C1.1 CLK1:IC1.14 CLK1:IC2.15 CLK1:IC2.16 CLK1:IC3.4 CLK1:IC3.8 CLK1:IC4.8 CLK1:IC5.4 CLK1:IC5.8 CLK1:IC6.12 CLK1:IC6.13 CLK1:R1.2 CLK1:R3.2 CLK1:R4.2 CLK1:R5.2 CLK1:R6.2 CONTROL_LOGIC1:IC1.18 CONTROL_LOGIC1:IC1.24 CONTROL_LOGIC1:IC2.18 CONTROL_LOGIC1:IC2.24 CONTROL_LOGIC1:IC3.6 CONTROL_LOGIC1:IC3.16 CONTROL_LOGIC1:IC5.14 CONTROL_LOGIC1:S1.NO CONTROL_LOGIC1:V1.7 CONTROL_LOGIC1:V1.9 CONTROL_LOGIC1:V1.10 X1.1
ZF: ALU1:IC5.3 CONTROL_LOGIC1:IC1.8 CONTROL_LOGIC1:IC2.8
|ALUWRITE: ALU1:IC6.19 CONTROL_LOGIC1:IC1.14 CONTROL_LOGIC1:LED4.A
|AREAD: A_REGISTER1:IC2.9 A_REGISTER1:IC2.10 A_REGISTER1:IC3.9 A_REGISTER1:IC3.10 INST_REGISTER1:IC1.3
|AWRITE: A_REGISTER1:IC1.19 CONTROL_LOGIC1:IC1.11 CONTROL_LOGIC1:LED14.A
|BREAD: B_REGISTER1:IC2.9 B_REGISTER1:IC2.10 B_REGISTER1:IC3.9 B_REGISTER1:IC3.10 INST_REGISTER1:IC1.6
|CLR: CONTROL_LOGIC1:IC5.1 CONTROL_LOGIC1:IC5.6 CONTROL_LOGIC1:IC5.9 CONTROL_LOGIC1:IC5.10 PROGRAM-COUNTER1:V1.1 PROGRAM-COUNTER1:V2.1 PROGRAM-COUNTER1:V3.1 PROGRAM-COUNTER1:V4.1
|FL: ALU1:IC5.9 ALU1:IC5.10 CONTROL_LOGIC1:IC1.13 CONTROL_LOGIC1:LED5.A
|INSTREAD: CONTROL_LOGIC1:IC2.13 CONTROL_LOGIC1:LED18.A INST_REGISTER1:IC2.9 INST_REGISTER1:IC2.10 INST_REGISTER1:IC3.9 INST_REGISTER1:IC3.10
|RAM_OUT: CONTROL_LOGIC1:IC2.11 CONTROL_LOGIC1:LED19.A RAM1:IC1.22
|RAM_WRITE: RAM1:IC1.27
|REG_READ: CONTROL_LOGIC1:IC1.10 CONTROL_LOGIC1:LED15.A INST_REGISTER1:IC1.2 INST_REGISTER1:IC1.5

## Tracks (layer width: path | path; a pad name or v marks a point on that pad's centre or on a via)
8B_1  (via drill 0.35)
  Top 0.152: RAM1:IC12.14 136.55,257.4 136.55,258.77 136.25,259.08 136.25,260.6 137.31,261.67 137.31,262.58 RAM1:IC1.11 | 84.58,297.79 84.58,298.55 83.52,299.62 83.52,321.72 84.89,323.09 RAM1:LED9.A | v91.59,295.05 87.33,295.05 84.58,297.79 | 84.58,297.79 RAM1:IC2.14 | 1.2 273.1,311.51 273.1,317.14 283.16,327.2 283.16,340.61 281.94,341.83 L1.A | v327.66,64.16 327.97,64.47 327.97,66.14 326.29,67.82 | v321.26,148.59 321.26,149.66 320.65,150.27 320.65,190.96 v322.48,192.79 | 326.29,67.82 326.29,68.43 325.68,69.04 325.22,69.04 324.31,69.95 324.31,99.82 v324.61,100.13 | 326.29,67.82 B_REGISTER1:IC3.14 | v322.02,275.23 322.02,291.24 324.46,293.67 324.92,293.67 325.53,294.28 325.53,294.89 PROGRAM-COUNTER1:IC1.14 | v321.87,240.03 v321.87,273.56 | v324,228.6 v322.78,229.82
  Bottom 0.152: INST_REGISTER1:IC3.14 137.01,246.13 137.01,247.65 137.92,248.56 137.92,255.58 136.7,256.79 136.7,257.25 RAM1:IC12.14 | v91.59,295.05 93.73,292.91 93.73,289.1 94.94,287.88 111.4,287.88 115.98,283.31 119.18,283.31 123.44,279.04 123.44,276.76 124.21,276 124.51,276 137.31,263.19 137.31,262.74 RAM1:IC1.11 | PROGRAM-COUNTER1:IC1.14 325.68,294.89 325.68,294.28 326.29,293.67 326.75,293.67 327.2,293.22 327.2,291.54 326.75,291.08 295.81,291.08 283.46,303.43 282.09,303.43 274.17,311.35 273.1,311.35 1.2 | v327.66,64.16 328.88,62.94 328.88,32 326.9,30.02 326.44,30.02 ALU1:IC6.18 | 324.76,195.07 A_REGISTER1:IC1.18 325.53,195.07 | 324.76,195.07 323.7,196.14 323.7,228.6 | 323.7,228.6 323.7,233.48 325.37,235.15 325.83,235.15 PROGRAM-COUNTER1:IC5.14 | v321.26,148.59 321.26,146.46 325.37,142.34 325.83,142.34 A_REGISTER1:IC3.14 325.83,142.19 327.81,140.21 327.81,120.55 327.2,119.94 324.76,119.94 323.55,118.72 323.55,102.41 324.61,101.35 v324.61,100.13 | 324.76,195.07 v322.48,192.79 | v322.02,275.23 322.02,273.71 v321.87,273.56 | v321.87,240.03 321.87,230.73 v322.78,229.82 | 323.7,228.6 v324,228.6 | RAM1:LED9.A 90.68,323.09 111.1,343.51 280.11,343.51 281.33,342.29 281.43,342.39
  Bottom 0.508: L1.A 281.43,342.39
8B_2  (via drill 0.35)
  Top 0.152: RAM1:IC1.12 139.9,262.58 139.9,262.13 138.68,260.91 138.68,258.93 139.14,258.47 139.14,257.4 RAM1:IC12.13 139.14,257.25 139.14,256.79 134.87,252.53 v132.74,252.53 | RAM1:IC2.13 87.17,297.79 87.17,298.86 87.63,299.31 87.63,318.21 92.51,323.09 RAM1:LED10.A | v90.83,291.39 88.39,293.83 v87.33,293.83 | 2.2 271.73,315.16 271.73,333.76 275.54,337.57 275.54,340.61 274.32,341.83 L2.A | v285.75,303.73 286.51,303.73 | 286.51,303.73 326.9,303.73 327.2,303.43 327.2,298.55 326.14,297.48 325.68,297.48 PROGRAM-COUNTER1:IC1.13 | 325.53,237.29 325.98,237.74 PROGRAM-COUNTER1:IC5.13 325.53,237.29 | 325.53,237.29 324,235.76 324,229.51 327.51,226.01 327.51,202.08 326.9,201.47 324.46,201.47 323.7,200.71 323.7,199.64 324.46,198.88 324.92,198.88 325.53,198.27 325.53,197.66 A_REGISTER1:IC1.17 325.68,197.51 323.7,195.53 323.7,192.02 v324,191.72 | v321.26,150.57 321.26,188.98 v322.17,189.89 | v328.88,100.89 328.88,78.03 327.51,76.66 325.22,76.66 324.61,76.05 324.61,72.24 325.22,71.63 325.68,71.63 326.29,71.02 326.29,70.41 B_REGISTER1:IC3.13 | v328.73,142.8 326.75,144.78 A_REGISTER1:IC3.13 | 286.51,279.04 286.51,303.73 | 286.51,279.04 290.32,275.23 v291.69,275.23 | v323.09,239.42 324.16,238.35 324.31,238.35 324.46,238.2 324.61,238.2 325.53,237.29 | v176.94,247.96 255.42,247.96 286.51,279.04